# Altium PCB SDC_V3.0.PcbDoc (part 1 of 4)
Units mm, origin at the board's own origin, x right, y up, seen from the top; angles counter-clockwise.
Board outline 130 x 100 mm, 4 copper layers (Top Layer, Ground Plane, Power Plane, Bottom Layer), stack 1.466 mm thick; 369 components, 219 nets, 1234 pads, 1046 vias.
Unrouted connection lines stored in the file: 2.
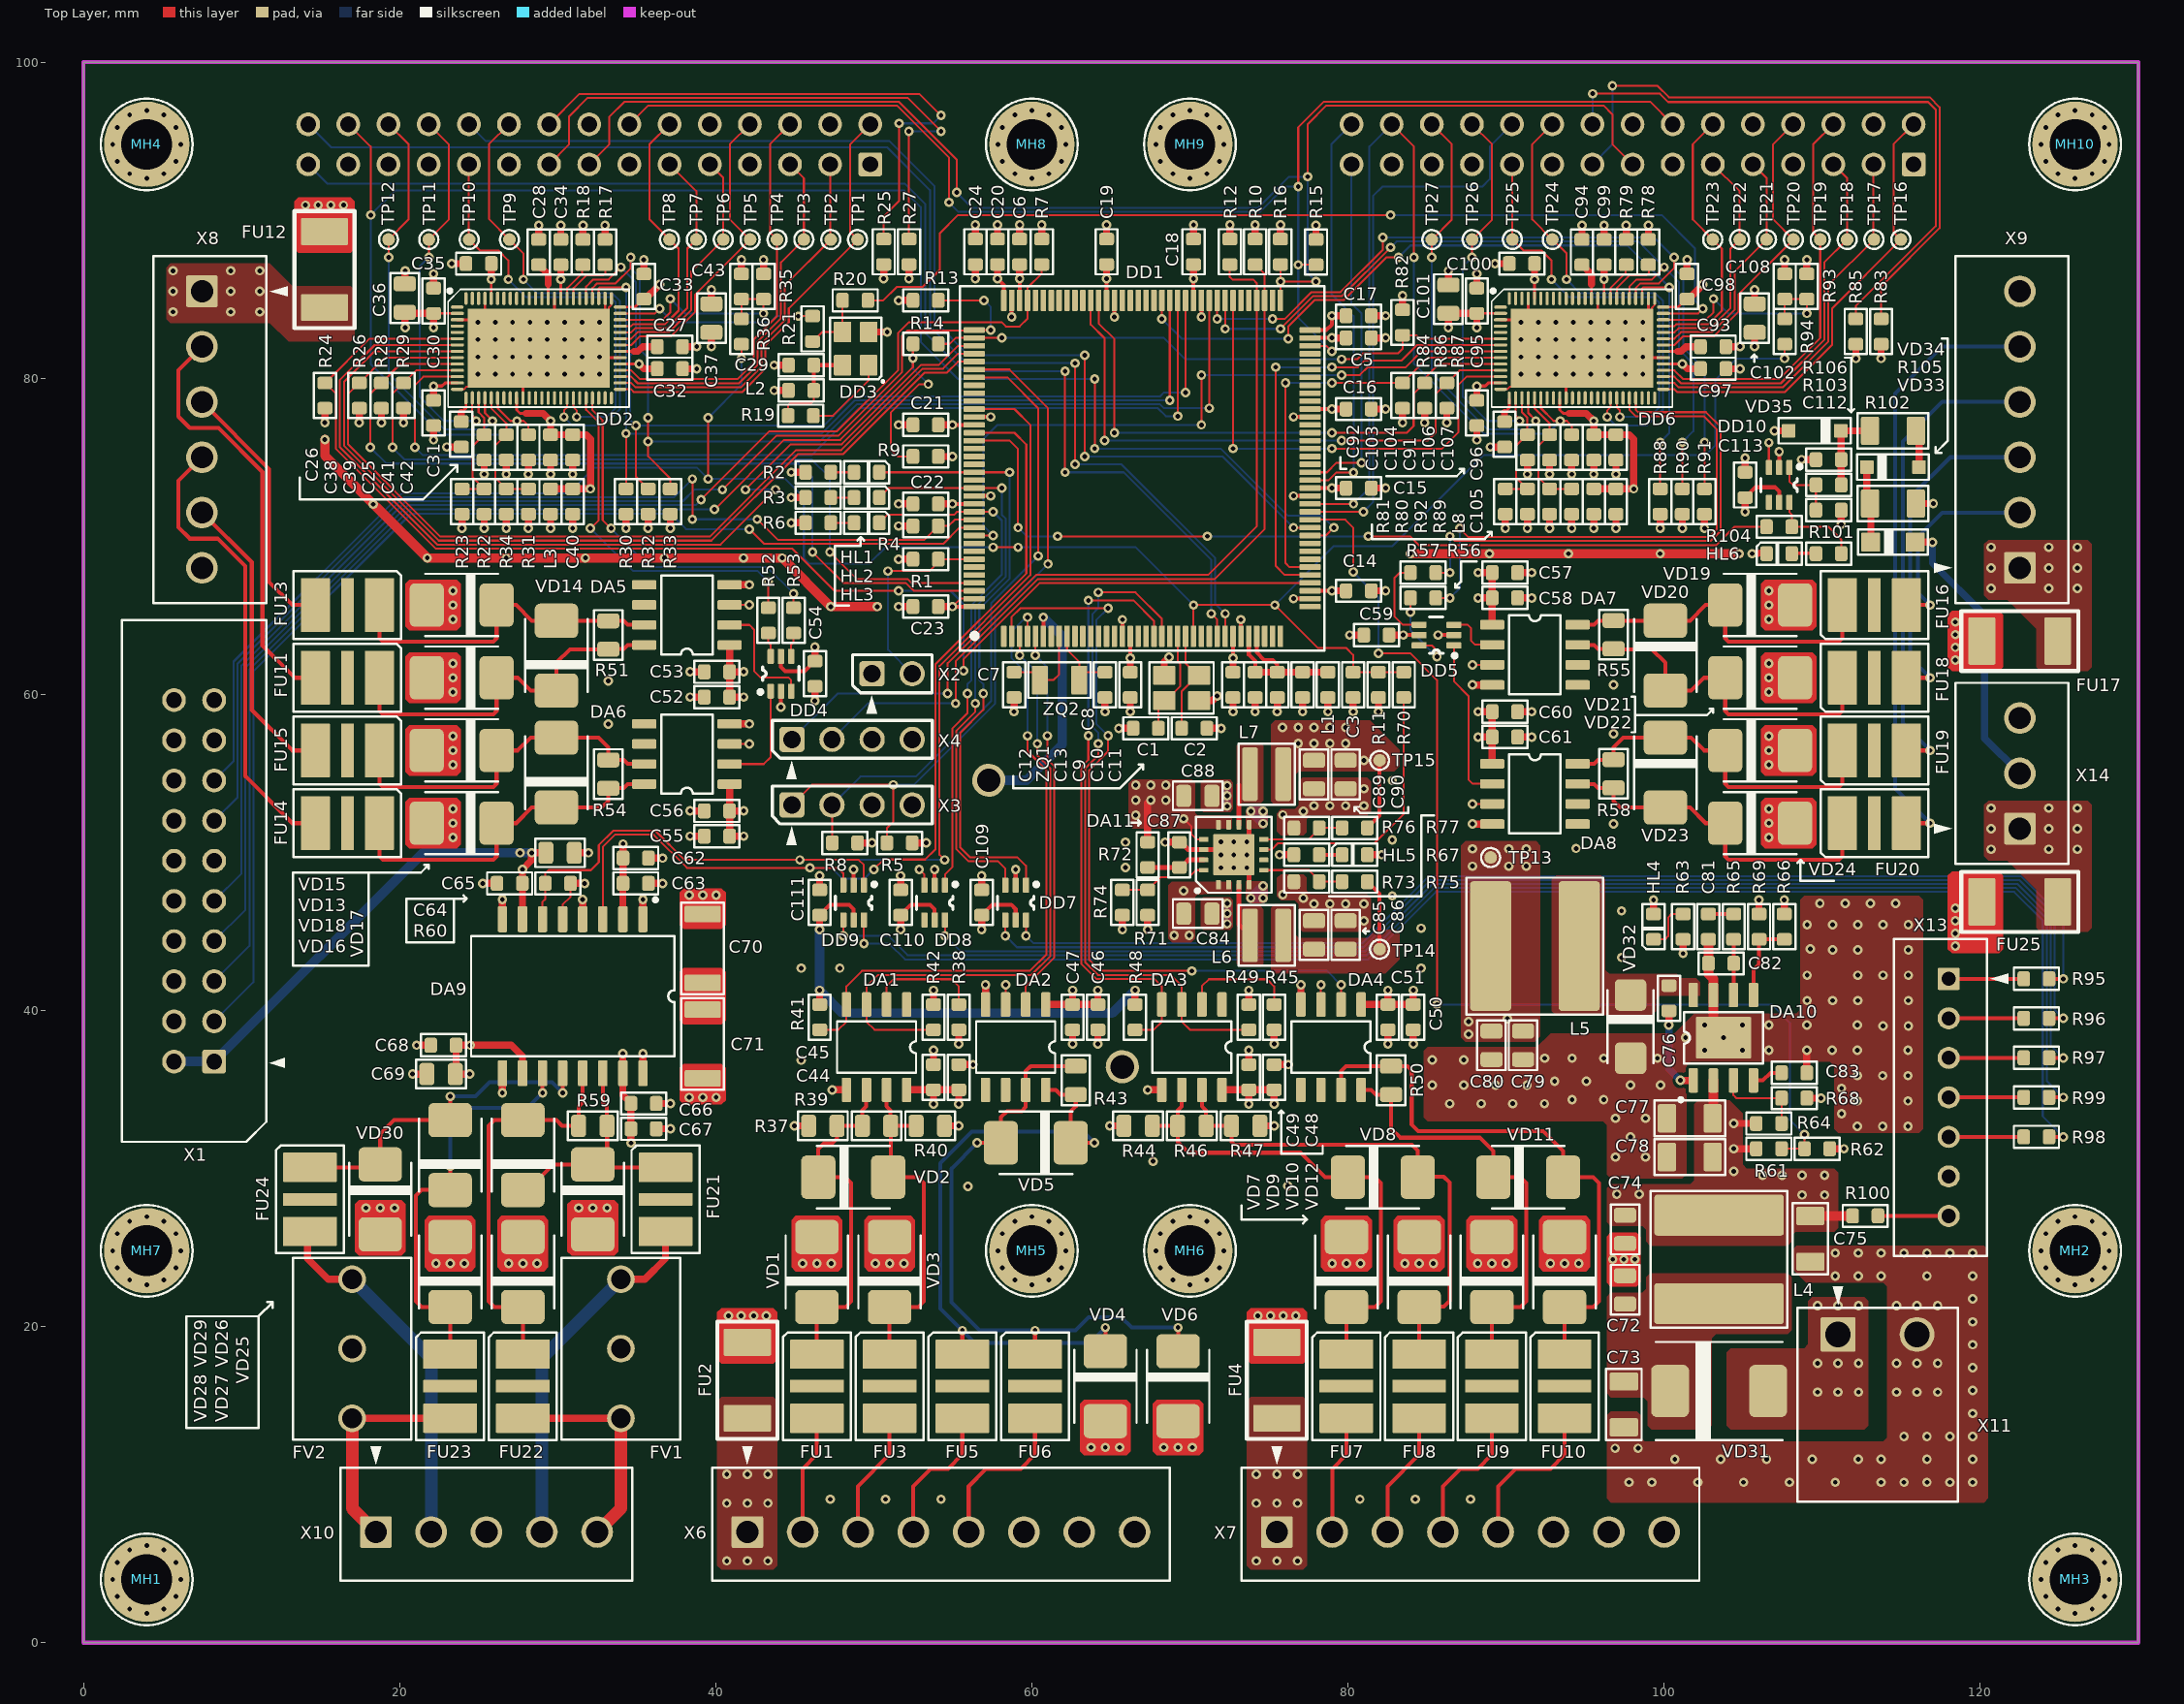
[diagram p0: Top Layer view]
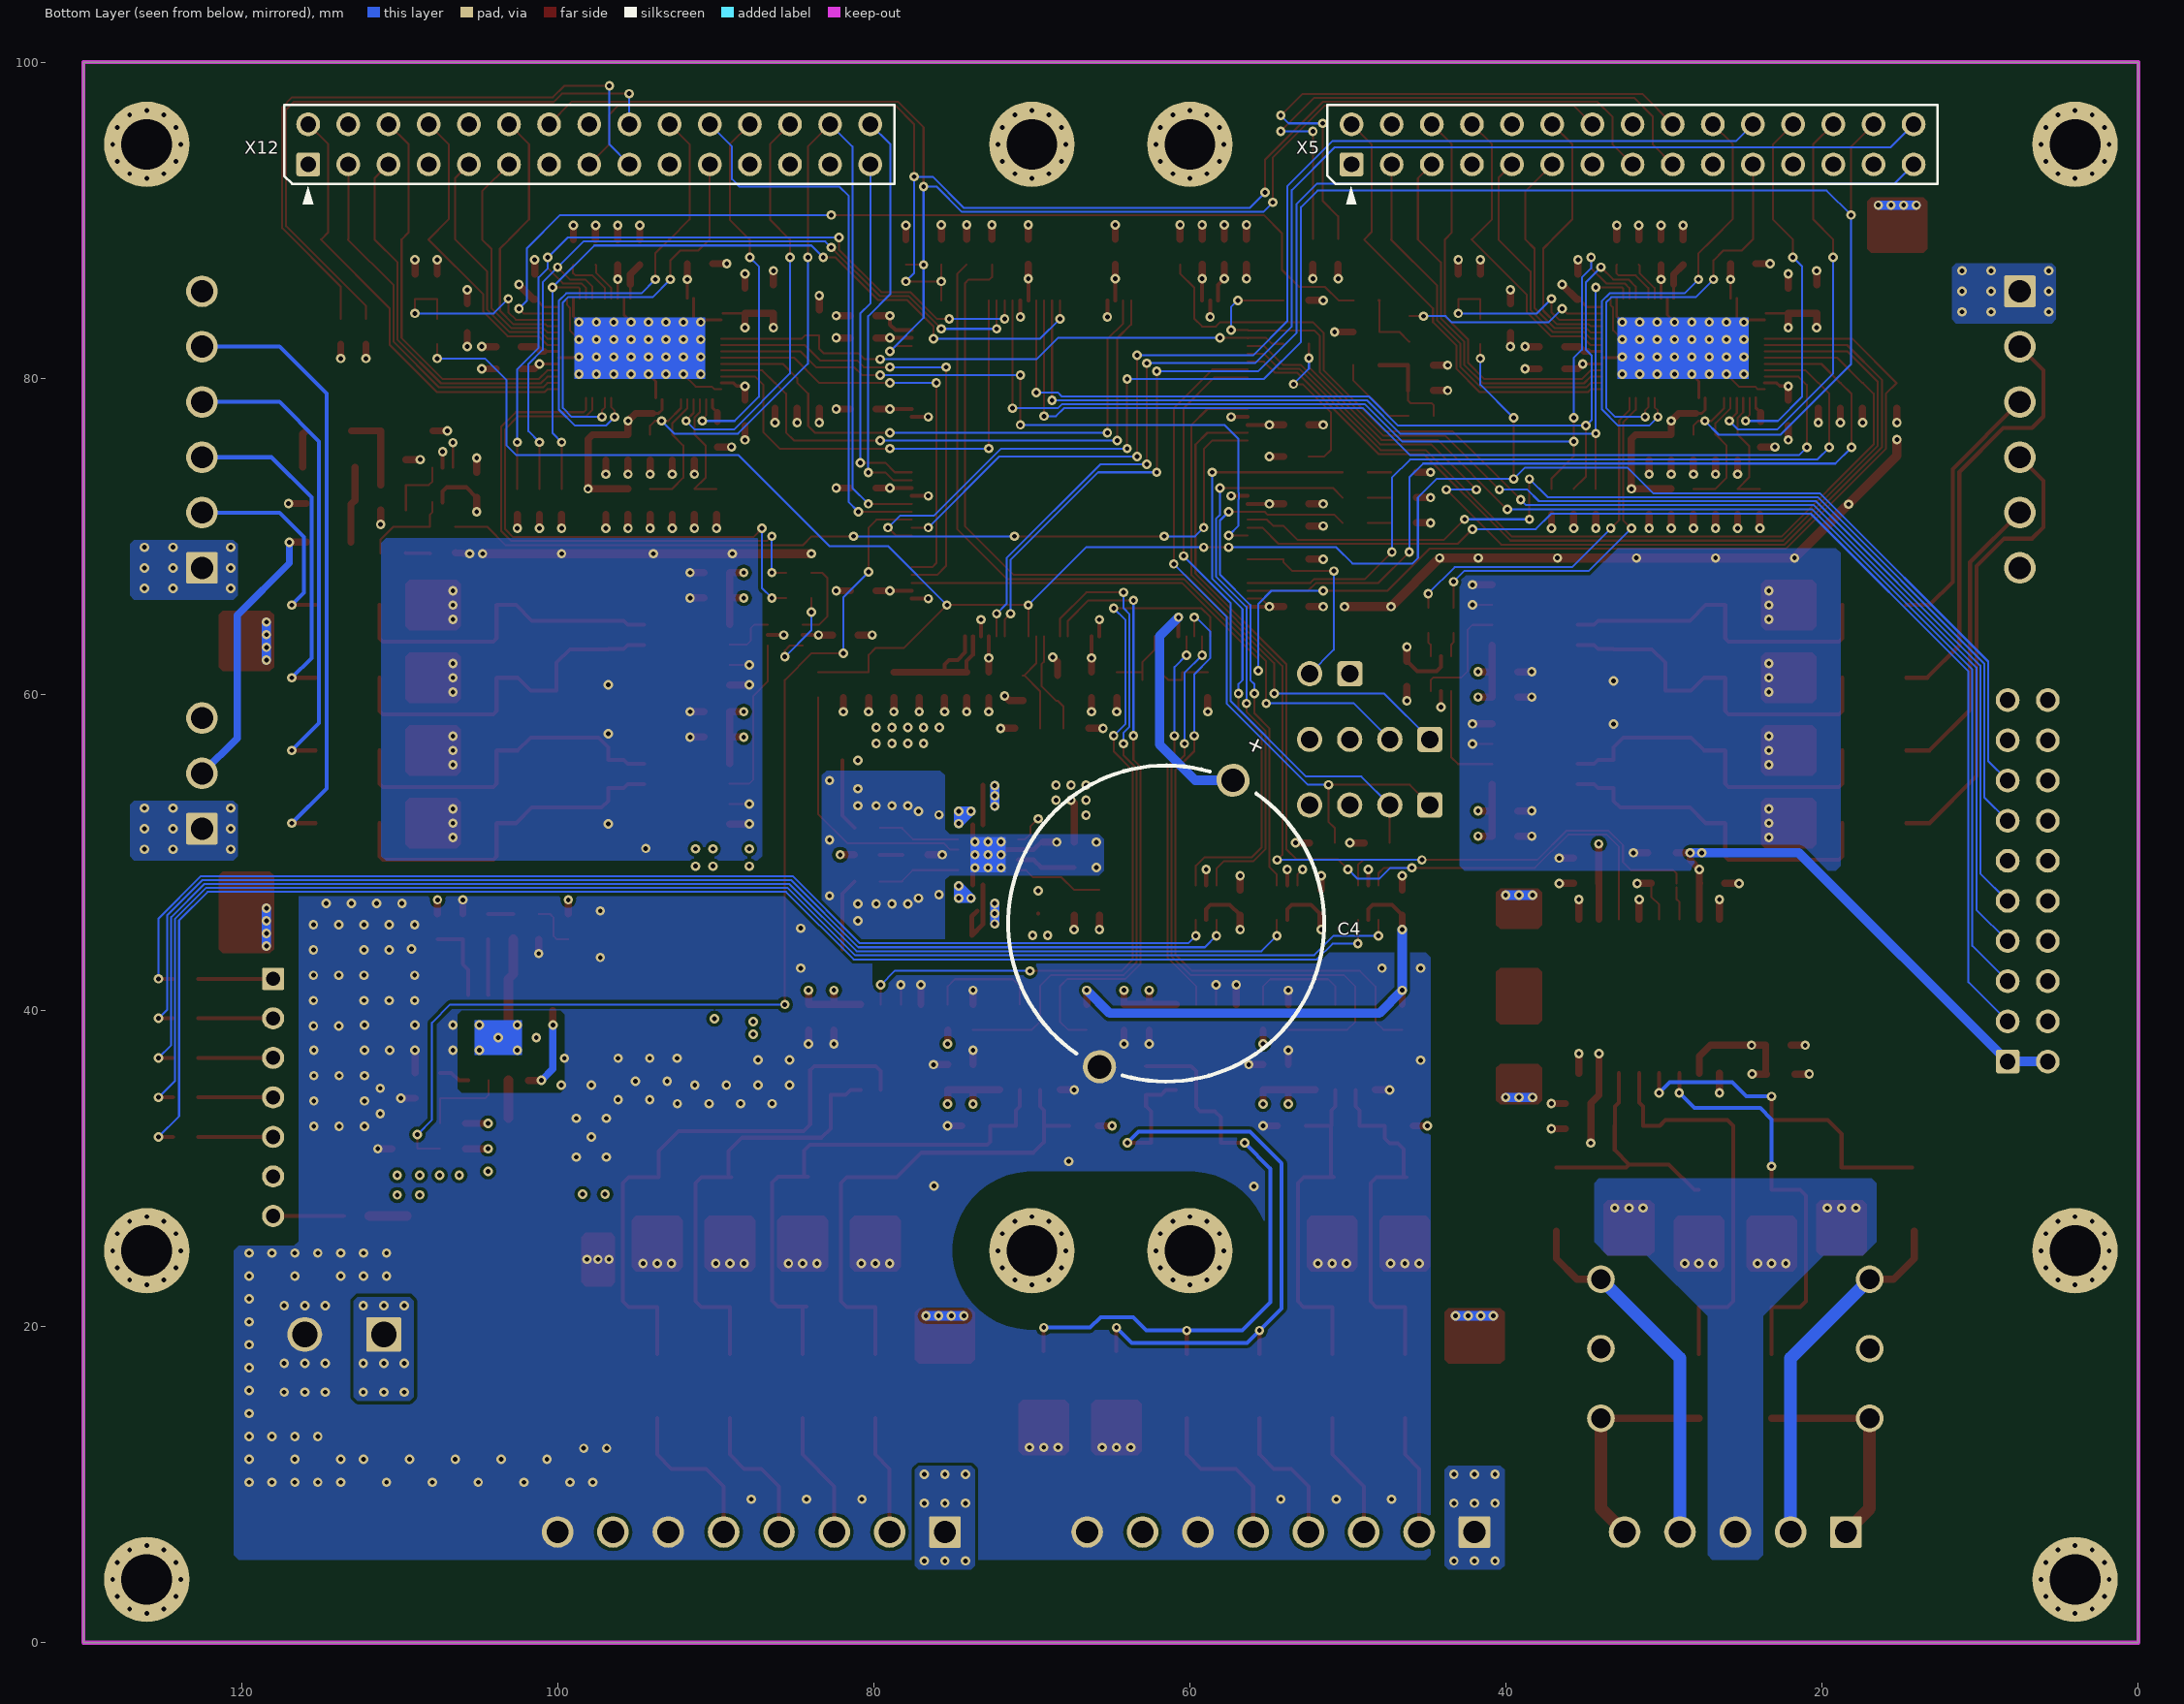
[diagram p1: Bottom Layer view, seen from below]
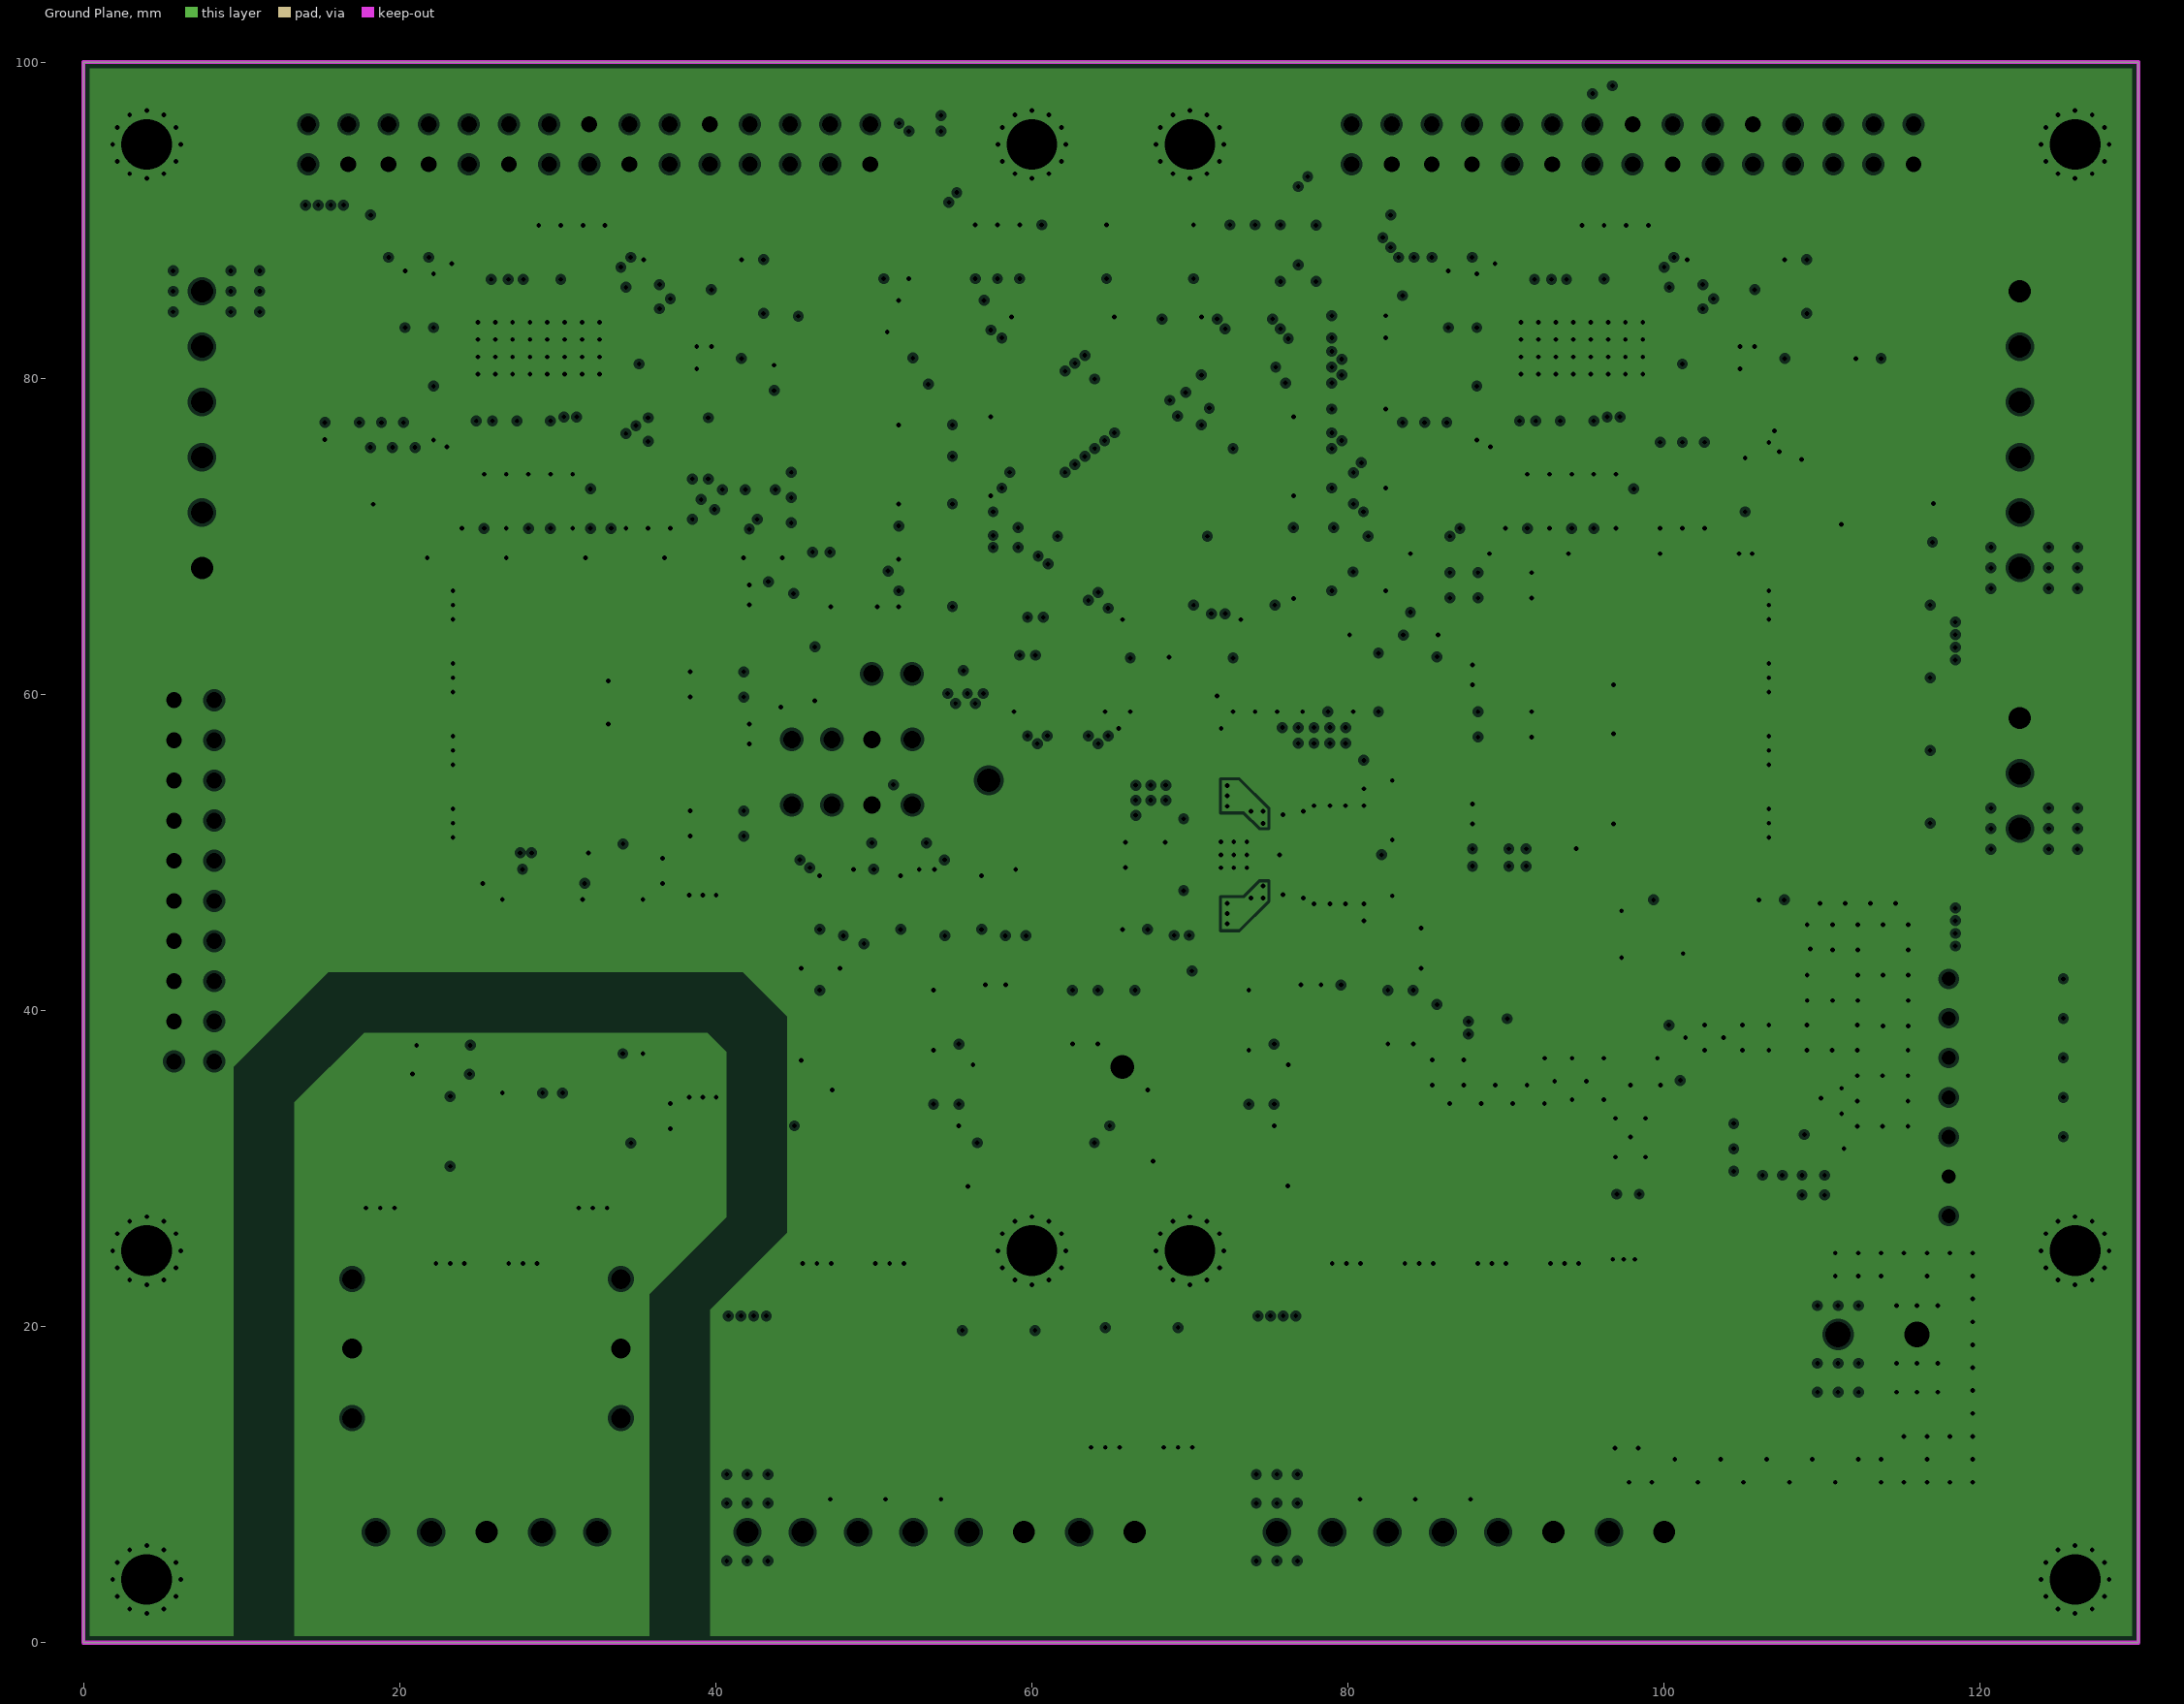
[diagram p2: Ground Plane, clearances drawn from the general rule]
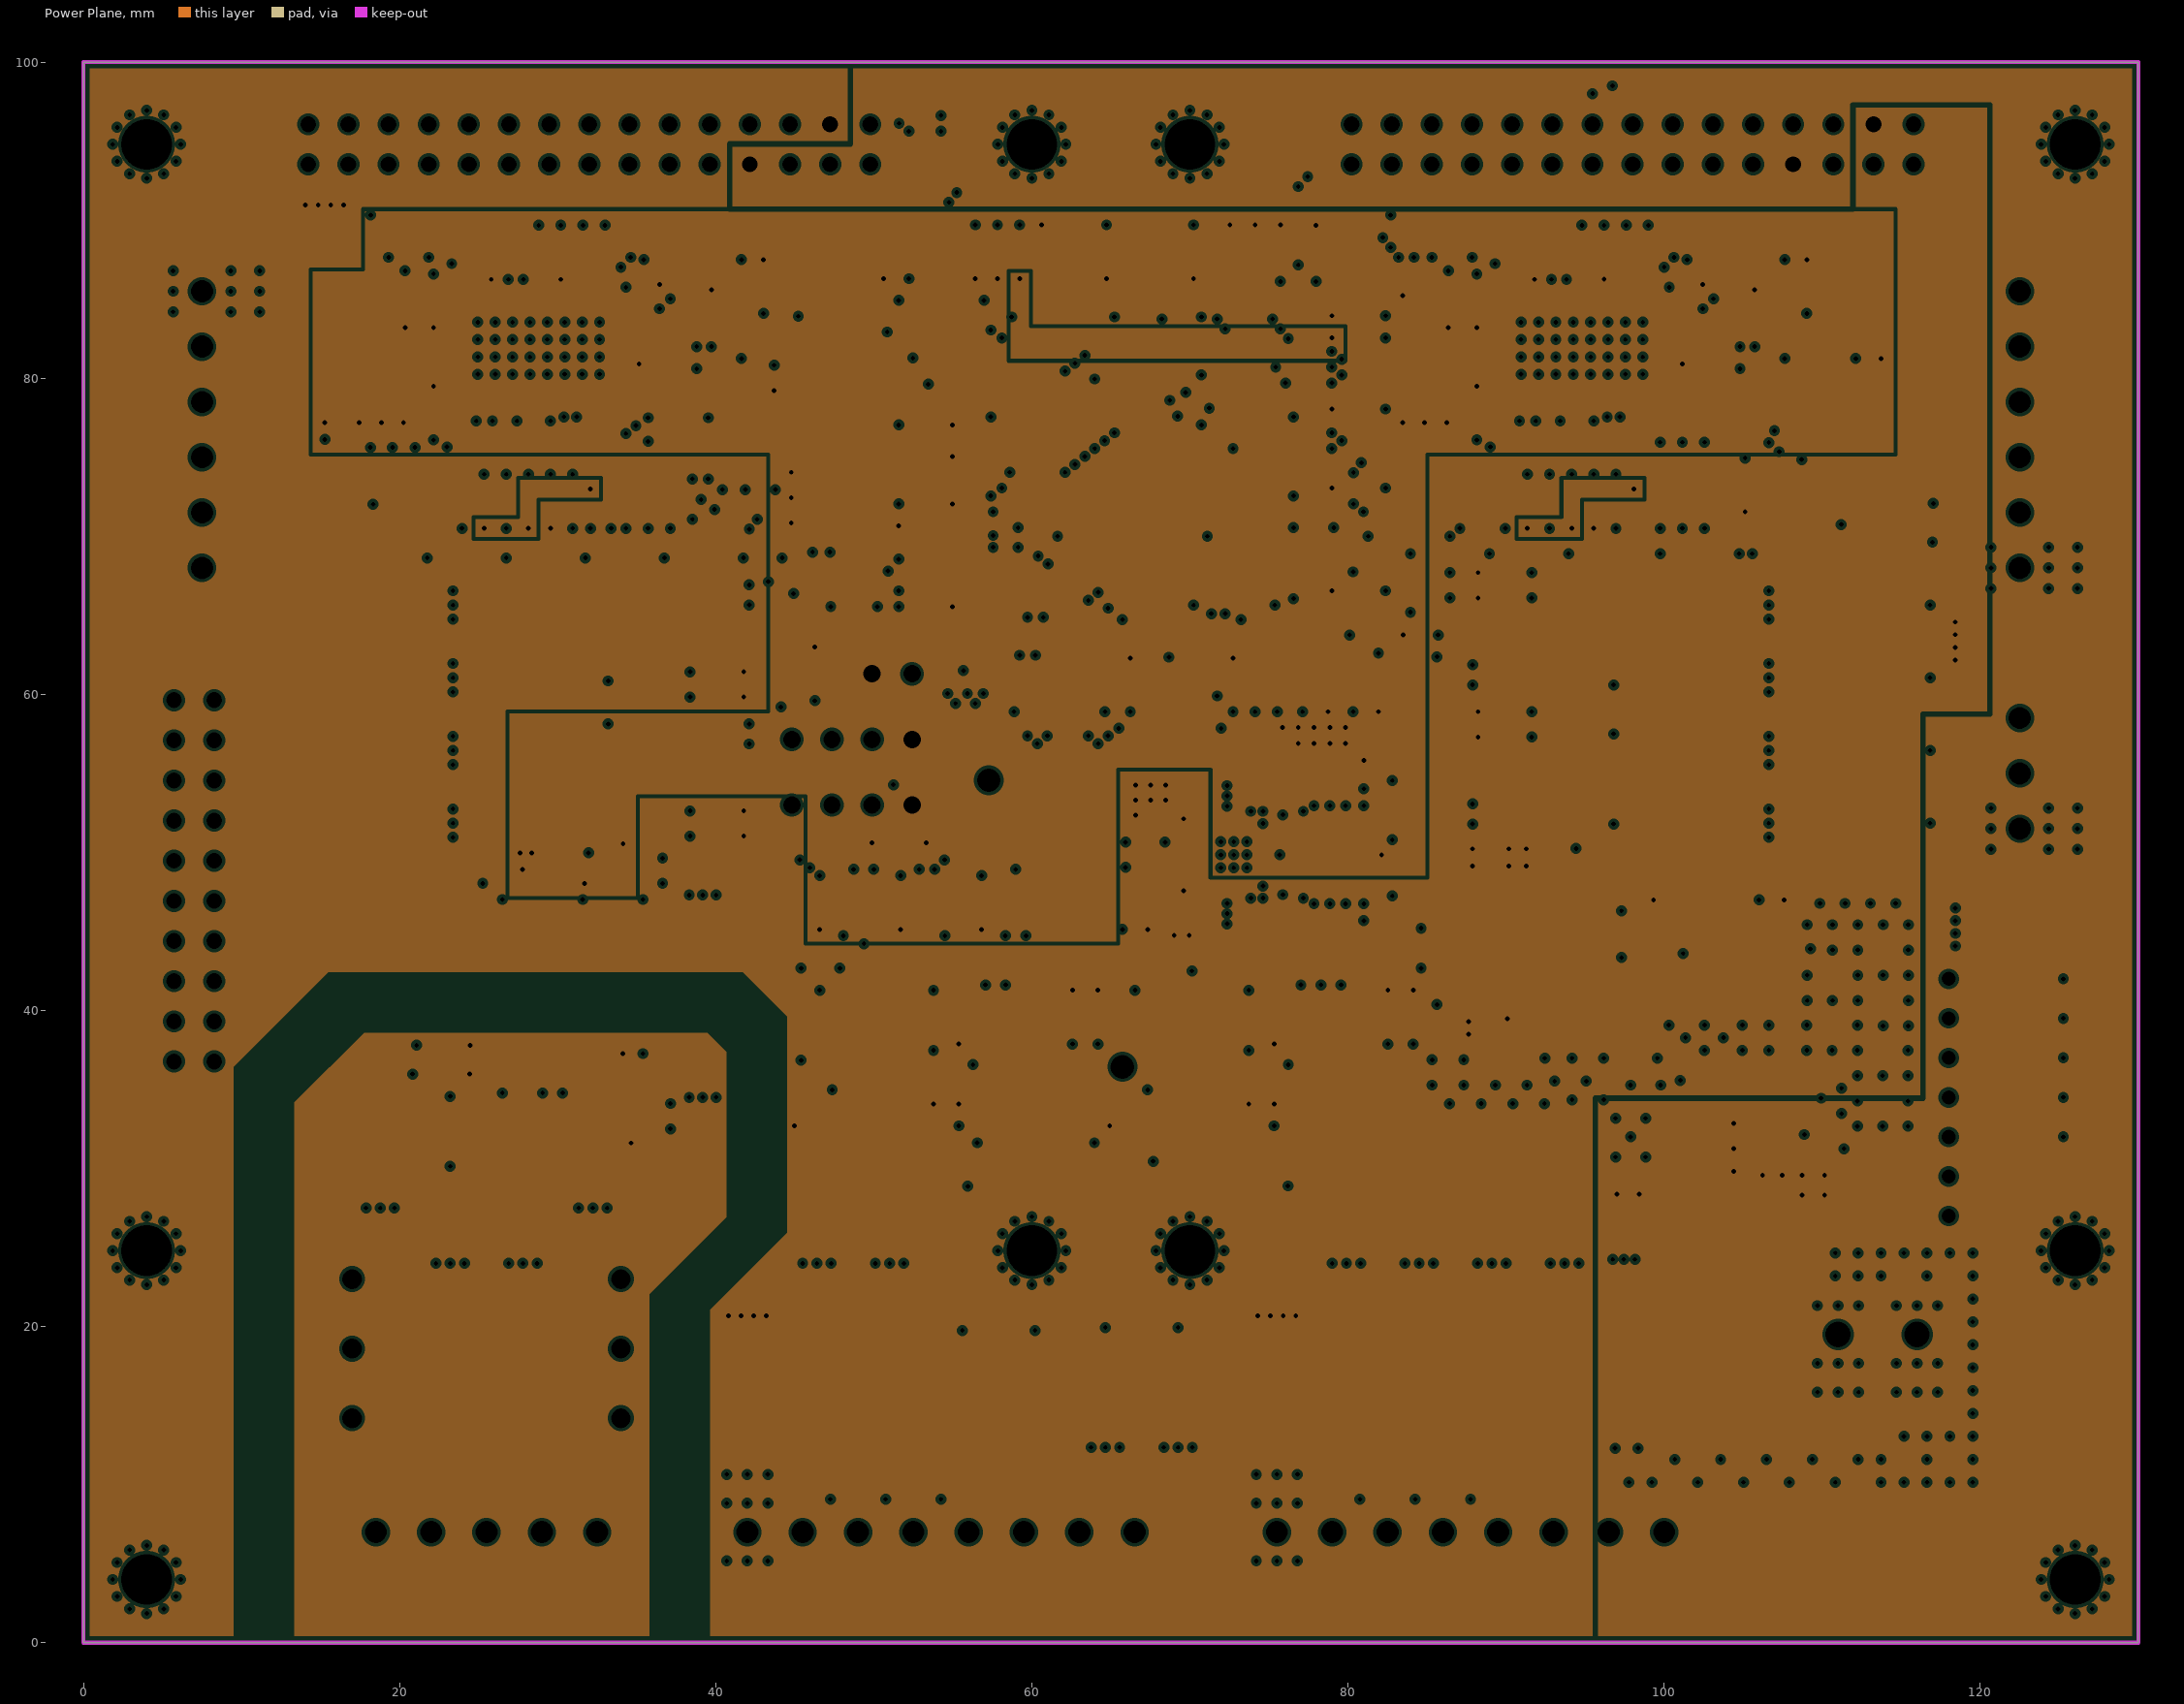
[diagram p3: Power Plane, clearances drawn from the general rule]

## Layer stack, top to bottom
Top Solder: solder mask 0.01, Solder Resist, Dk 3.5
Top Layer: signal copper 0.018
Dielectric 1: prepreg 0.115, Dk 4.2
Ground Plane: plane copper 0.018, net GND
Dielectric 3: core 1.164, Dk 4.2
Power Plane: plane copper 0.018, net (Multiple Nets)
Dielectric 2: prepreg 0.115, Dk 4.2
Bottom Layer: signal copper 0.018
Bottom Solder: solder mask 0.01, Solder Resist, Dk 3.5

## Board outline
0,0 0,100 130,100 130,0

## Design rules (kind name [scope] priority, off if disabled: settings)
Clearance ClearancePoly [InPolygon] p1: gap=0.2 ignorepadtopadclearanceinfootprint=FALSE except(0: Arc-Hole Track-Hole SMDPad-Hole THPad-Hole Via-Hole Fill-Hole Poly-Hole Region-Hole Text-Hole)
Clearance [All] p2: gap=0.125 ignorepadtopadclearanceinfootprint=FALSE except(0: Arc-Hole Track-Hole SMDPad-Hole THPad-Hole Via-Hole Fill-Hole Poly-Hole Region-Hole Text-Hole)
ComponentClearance [All] p1: gap=0 collisioncheckmode=3 verticalgap=0 showdistances=FALSE
DiffPairsRouting Ethernet_DP [(InDifferentialPairClass('ETH_RX') OR InDifferentialPairClass('ETH_TX'))] p1: maxlimit=0.13 minlimit=0.13 mostfreqgap=0.13 toplayer_minwidth=0.125 toplayer_maxwidth=0.125 toplayer_prefwidth=0.125 bottomlayer_minwidth=0.125 bottomlayer_maxwidth=0.125 bottomlayer_prefwidth=0.125 maxuncoupledlength=15
DiffPairsRouting [All] p2: maxlimit=0.254 minlimit=0.254 mostfreqgap=0.254 toplayer_minwidth=0.381 toplayer_maxwidth=0.381 toplayer_prefwidth=0.381 bottomlayer_minwidth=0.381 bottomlayer_maxwidth=0.381 bottomlayer_prefwidth=0.381 maxuncoupledlength=12.7
Height [All] p1: minheight=0 maxheight=100 prefheight=100
HoleSize [All] p1: absolutevalues=TRUE maxlimit=5 minlimit=0.3 maxpercent=80.000 minpercent=20.000
HoleToHoleClearance [All] p1: gap=0.2 allowstackedmicrovias=TRUE
MinimumAnnularRing MinimumAnnularRing_0.3 [Not IsVia] p1: minimumring=0.2
MinimumSolderMaskSliver [All] p1: minsoldermaskwidth=0.15
PlaneClearance [All] p1: clearance=0.2
PlaneConnect [All] p1: planeconnectstyle=Direct reliefexpansion=0.508 reliefentries=4 reliefconductorwidth=0.254 reliefairgap=0.254
PolygonConnect PolygonConnectVIA [IsVia] p1: connectstyle=Direct reliefconductorwidth=0.254 reliefentries=4 polygonreliefangle="90 Angle" airgapwidth=0.254
PolygonConnect [All] p2: connectstyle=Direct reliefconductorwidth=0.3 reliefentries=4 polygonreliefangle="90 Angle" airgapwidth=0.3
RoutingVias [IsVia] p1: holewidth=0.3 width=0.6 viastyle="Through Hole" minholewidth=0.3 minwidth=0.6 maxholewidth=2 maxwidth=1.5
SilkToSilkClearance [All] p1: silktosilkclearance=0
SilkToSolderMaskClearance [IsPad] p1: minsilkscreentomaskgap=0 clearancetoexposedcopper=TRUE
SolderMaskExpansion [All] p1: expansion=0.05 istentingtop=FALSE
Width Width_Arcs [IsArc] p1: maxlimit=0.254 minlimit=0.1 preferedwidth=0.254
Width [All] p2: maxlimit=10 minlimit=0.125 preferedwidth=0.125
20 further rules are at their usual default settings.

## Classes and differential pairs
component class SNS_INPUT: C112 C113 DD10 FU25 HL6 R101 R102 R103 R104 R105 R106 VD33 VD34 VD35 X14
component class EXT_LED: C109 C110 C111 DD7 DD8 DD9 R95 R96 R97 R98 R99 R100 X13
component class INC_ENC_IF: C52 C53 C54 C55 C56 C57 C58 C59 C60 C61 DA5 DA6 DA7 DA8 DD4 DD5 FU11 FU12 FU13 FU14 FU15 FU16 FU17 FU18 FU19 FU20 R51 R52 R53 R54 R55 R56 R57 R58 VD13 VD14 VD15 VD16 VD17 VD18 VD19 VD20 VD21 VD22 VD23 VD24 X8 X9
component class RS_IF: C62 C63 C64 C65 C66 C67 C68 C69 C70 C71 DA9 FU21 FU22 FU23 FU24 FV1 FV2 R59 R60 VD25 VD26 VD27 VD28 VD29 VD30 X10
component class ABS_ENC_IF: C44 C45 C46 C47 C48 C49 C50 C51 DA1 DA2 DA3 DA4 FU1 FU2 FU3 FU4 FU5 FU6 FU7 FU8 FU9 FU10 R37 R38 R39 R40 R41 R42 R43 R44 R45 R46 R47 R48 R49 R50 VD1 VD2 VD3 VD4 VD5 VD6 VD7 VD8 VD9 VD10 VD11 VD12 X6 X7
component class DRIVER_A: C25 C26 C27 C28 C29 C30 C31 C32 C33 C34 C35 C36 C37 C38 C39 C40 C41 C42 C43 DD2 DD3 L2 L3 R17 R18 R19 R20 R21 R22 R23 R24 R25 R26 R27 R28 R29 R30 R31 R32 R33 R34 R35 R36 TP1 TP2 TP3 TP4 TP5 TP6 TP7 TP8 TP9 TP10 TP11 TP12 X5
component class MCU: C1 C2 C3 C4 C5 C6 C7 C8 C9 C10 C11 C12 C13 C14 C15 C16 C17 C18 C19 C20 C21 C22 C23 C24 DD1 HL1 HL2 HL3 L1 R1 R2 R3 R4 R5 R6 R7 R8 R9 R10 R11 R12 R13 R14 R15 R16 X1 X2 X3 X4 ZQ1 ZQ2
component class DRIVER_B: C91 C92 C93 C94 C95 C96 C97 C98 C99 C100 C101 C102 C103 C104 C105 C106 C107 C108 DD6 L8 R78 R79 R80 R81 R82 R83 R84 R85 R86 R87 R88 R89 R90 R91 R92 R93 R94 TP16 TP17 TP18 TP19 TP20 TP21 TP22 TP23 TP24 TP25 TP26 TP27 X12
component class POWER: C72 C73 C74 C75 C76 C77 C78 C79 C80 C81 C82 C83 C84 C85 C86 C87 C88 C89 C90 DA10 DA11 HL4 HL5 L4 L5 L6 L7 MH1 MH2 MH3 MH4 MH5 MH6 MH7 MH8 MH9 MH10 R61 R62 R63 R64 R65 R66 R67 R68 R69 R70 R71 R72 R73 R74 R75 R76 R77 TP13 TP14 TP15 VD31 VD32 X11

## Components (designator, comment, footprint, x,y, rotation, side; value= is the part's Value field where it differs from the comment)
C1 "6.8pF" C0603N 67.2,57.85 r180 top
C2 "6.8pF" C0603N 70.275,57.85 r0 top
C3 "0.1uF" C0603N 80.325,60.6 r90 top
C4 "1.5F" KR-5R5H155-R 61.5,45.5 r115 bottom
C5 "2.2uF" C0603N 80.675,82.55 r180 top
C6 "2.2uF" C0603N 59.225,88 r270 top
C7 "4.7pF" C0603N 58.875,60.6 r270 top
C8 "4.7pF" C0603N 64.625,60.6 r270 top
C9 "0.1uF" C0603N 74.125,60.6 r90 top
C10 "0.1uF" C0603N 75.525,60.6 r90 top
C11 "4.7uF" C0603N 77.125,60.6 r90 top
C12 "0.1uF" C0603N 66.225,60.6 r90 top
C13 "0.1uF" C0603N 72.725,60.6 r90 top
C14 "0.1uF" C0603N 80.675,66.55 r180 top
C15 "0.1uF" C0603N 80.675,73.05 r180 top
C16 "0.1uF" C0603N 80.675,78.05 r180 top
C17 "0.1uF" C0603N 80.675,83.95 r180 top
C18 "0.1uF" C0603N 70.225,88 r270 top
C19 "0.1uF" C0603N 64.725,88 r270 top
C20 "0.1uF" C0603N 57.825,88 r270 top
C21 "0.1uF" C0603N 53.275,77.05 r0 top
C22 "0.1uF" C0603N 53.275,72.05 r0 top
C23 "0.1uF" C0603N 53.275,65.55 r0 top
C24 "4.7uF" C0603N 56.425,88 r270 top
C25 "0.1uF" C0603N 28.15,75.625 r90 top
C26 "0.1uF" C0603N 23.9,76.45 r90 top
C27 "0.1uF" C0603N 37.1,82 r180 top
C28 "0.1uF" C0603N 28.8,87.975 r270 top
C29 "10nF" C0603N 45.4,80.825 r180 top
C30 "0.1uF" C0603N 22.15,84.9 r270 top
C31 "0.1uF" C0603N 22.15,77.8 r90 top
C32 "0.1uF" C0603N 37.1,80.6 r180 top
C33 "0.1uF" C0603N 35.45,85.8 r270 top
C34 "0.1uF" C0603N 30.2,87.975 r270 top
C35 "0.1uF" C0603N 25,87.25 r0 top
C36 "22uF" C0805N 20.325,85.075 r270 top
C37 "22uF" C0805N 39.725,83.8 r90 top
C38 "0.1uF" C0603N 25.35,75.625 r90 top
C39 "0.1uF" C0603N 26.75,75.625 r90 top
C40 "1uF" C0603N 30.95,72.2 r90 top
C41 "0.1uF" C0603N 29.55,75.625 r90 top
C42 "4.7uF" C0603N 30.95,75.625 r90 top
C43 "0.1uF" C0603N 41.625,85.8 r270 top
C44 "4.7uF" C0603N 55.375,35.775 r270 top
C45 "0.1uF" C0603N 53.775,35.775 r270 top
C46 "4.7uF" C0603N 64.175,39.575 r90 top
C47 "0.1uF" C0603N 62.575,39.575 r90 top
C48 "4.7uF" C0603N 75.325,35.775 r270 top
C49 "0.1uF" C0603N 73.725,35.775 r270 top
C50 "4.7uF" C0603N 84.125,39.575 r90 top
C51 "0.1uF" C0603N 82.525,39.575 r90 top
C52 "4.7uF" C0603N 40.075,59.825 r0 top
C53 "0.1uF" C0603N 40.075,61.425 r0 top
C54 "0.1uF" C0603N 46.275,61.3 r90 top
C55 "4.7uF" C0603N 40.075,51.025 r0 top
C56 "0.1uF" C0603N 40.075,52.625 r0 top
C57 "4.7uF" C0603N 89.925,67.7 r180 top
C58 "0.1uF" C0603N 89.925,66.1 r180 top
C59 "0.1uF" C0603N 81.8,63.75 r0 top
C60 "4.7uF" C0603N 89.925,58.9 r180 top
C61 "0.1uF" C0603N 89.925,57.3 r180 top
C62 "0.1uF" C0603N 34.937,49.637 r180 top
C63 "10nF" C0603N 34.937,48.037 r0 top
C64 "10uF" C0805N 30.15,49.975 r180 top
C65 "0.1uF" C0603N 26.962,48.037 r0 top
C66 "10nF" C0603N 35.437,34.112 r0 top
C67 "0.1uF" C0603N 35.437,32.512 r180 top
C68 "0.1uF" C0603N 22.775,37.8 r0 top
C69 "10uF" C0805N 22.625,35.975 r0 top
C70 "1nF" C1808N 39.175,43.925 r90 top
C71 "1nF" C1808N 39.175,37.875 r90 top
C72 "0.1uF" C0805N 97.525,22.325 r270 top
C73 "10uF" C1206N 97.45,15.075 r90 top
C74 "0.1uF" C0805N 97.525,26.15 r90 top
C75 "10uF" C1206N 109.25,25.55 r90 top
C76 "0.1uF" C0603N 100.3,40.775 r270 top
C77 "10uF" C1206N 101.625,33.175 r0 top
C78 "10uF" C1206N 101.625,30.725 r0 top
C79 "22uF" C0805N 91.075,37.8 r90 top
C80 "22uF" C0805N 89.075,37.8 r90 top
C81 "1nF" C0603N 102.8,45.3 r90 top
C82 "6.8pF" C0603N 103.6,42.975 r0 top
C83 "8.2nF" C0603N 108.225,36.05 r180 top
C84 "10uF" C0805N 70.5,46.125 r180 top
C85 "22uF" C0805N 77.85,44.775 r270 top
C86 "22uF" C0805N 79.85,44.775 r270 top
C87 "0.47uF" C0603N 69.325,49.85 r270 top
C88 "10uF" C0805N 70.5,53.575 r180 top
C89 "22uF" C0805N 77.85,54.925 r90 top
C90 "22uF" C0805N 79.85,54.925 r90 top
C91 "0.1uF" C0603N 94.15,75.625 r90 top
C92 "0.1uF" C0603N 89.9,76.45 r90 top
C93 "0.1uF" C0603N 103.1,82 r180 top
C94 "0.1uF" C0603N 94.8,87.975 r270 top
C95 "0.1uF" C0603N 88.15,84.9 r270 top
C96 "0.1uF" C0603N 88.15,77.8 r90 top
C97 "0.1uF" C0603N 103.1,80.6 r180 top
C98 "0.1uF" C0603N 101.45,85.8 r270 top
C99 "0.1uF" C0603N 96.2,87.975 r270 top
C100 "0.1uF" C0603N 91,87.25 r0 top
C101 "22uF" C0805N 86.35,85 r270 top
C102 "22uF" C0805N 105.725,83.8 r90 top
C103 "0.1uF" C0603N 91.35,75.625 r90 top
C104 "0.1uF" C0603N 92.75,75.625 r90 top
C105 "1uF" C0603N 96.95,72.2 r90 top
C106 "0.1uF" C0603N 95.55,75.625 r90 top
C107 "4.7uF" C0603N 96.95,75.625 r90 top
C108 "0.1uF" C0603N 107.625,85.8 r270 top
C109 "0.1uF" C0603N 56.825,46.825 r270 top
C110 "0.1uF" C0603N 51.7,46.825 r270 top
C111 "0.1uF" C0603N 46.575,46.825 r270 top
C112 "10nF" C0603N 110.4,71.65 r0 top
C113 "0.1uF" C0603N 105.125,73.25 r270 top
DA1 "ADM4852ARZ" SOIC8 50.175,37.675 r270 top
DA2 "ADM4857ARZ" SOIC8 58.975,37.675 r270 top
DA3 "ADM4852ARZ" SOIC8 70.125,37.675 r270 top
DA4 "ADM4857ARZ" SOIC8 78.925,37.675 r270 top
DA5 "ADM4857ARZ" SOIC8 38.175,65.025 r180 top
DA6 "ADM4857ARZ" SOIC8 38.175,56.225 r180 top
DA7 "ADM4857ARZ" SOIC8 91.825,62.5 r0 top
DA8 "ADM4857ARZ" SOIC8 91.825,53.7 r0 top
DA9 "ADM2687EBRIZ" SOIC16_IC 30.95,40.9 r180 top
DA10 "TPS54332DDAR" SOIC8-EP 103.75,38.275 r90 top
DA11 "LM26420XSQ/NOPB" RUM0016A 72.775,49.85 r90 top
DD1 "STM32H743ZIT6" LQFP144 66.975,74.3 r0 top
DD2 "TMC4671-LA" QFN76-EP 28.8,81.9 r0 top
DD3 "ASE-25.000MHZ-L-C-T" ASE 48.85,81.875 r90 top
DD4 "74LVC2G17GW,125" SOT363-2 44.125,61.3 r0 top
DD5 "74LVC2G17GW,125" SOT363-2 85.6,63.75 r90 top
DD6 "TMC4671-LA" QFN76-EP 94.8,81.9 r0 top
DD7 "74LVC2G17GW,125" SOT363-2 58.975,46.825 r180 top
DD8 "74LVC2G17GW,125" SOT363-2 53.85,46.825 r180 top
DD9 "74LVC2G17GW,125" SOT363-2 48.725,46.825 r180 top
DD10 "74LVC2G17GW,125" SOT363-2 107.275,73.25 r180 top
FU1 "200mA" TBU-CA 46.4,16.225 r270 top
FU2 "300mA" MF-MSMF 42,16.6 r270 top
FU3 "200mA" TBU-CA 51,16.225 r270 top
FU4 "300mA" MF-MSMF 75.5,16.6 r270 top
FU5 "200mA" TBU-CA 55.6,16.225 r270 top
FU6 "200mA" TBU-CA 60.2,16.225 r270 top
FU7 "200mA" TBU-CA 79.9,16.225 r270 top
FU8 "200mA" TBU-CA 84.5,16.225 r270 top
FU9 "200mA" TBU-CA 89.1,16.225 r270 top
FU10 "200mA" TBU-CA 93.7,16.225 r270 top
FU11 "200mA" TBU-CA 16.7,61.05 r180 top
FU12 "300mA" MF-MSMF 15.25,86.875 r270 top
FU13 "200mA" TBU-CA 16.7,65.65 r180 top
FU14 "200mA" TBU-CA 16.7,51.85 r180 top
FU15 "200mA" TBU-CA 16.7,56.45 r180 top
FU16 "200mA" TBU-CA 113.3,65.65 r0 top
FU17 "300mA" MF-MSMF 122.5,63.375 r0 top
FU18 "200mA" TBU-CA 113.3,61.05 r0 top
FU19 "200mA" TBU-CA 113.3,56.45 r0 top
FU20 "200mA" TBU-CA 113.3,51.85 r0 top
FU21 "200mA" TBU-CA 36.825,28.05 r270 top
FU22 "200mA" TBU-CA 27.8,16.225 r270 top
FU23 "200mA" TBU-CA 23.2,16.225 r270 top
FU24 "200mA" TBU-CA 14.325,28.05 r270 top
FU25 "500mA" MF-MSMF 122.5,46.875 r180 top
FV1 "F3R75-01J 75V" GDT_3PIN_B2 34,18.6 r270 top
FV2 "F3R75-01J 75V" GDT_3PIN_B2 17,18.6 r90 top
HL1 "GNL-0603SRC" LED0603 49.55,74.05 r180 top
HL2 "GNL-0603GC" LED0603 49.55,72.45 r180 top
HL3 "GNL-0603GC" LED0603 49.55,70.85 r180 top
HL4 "GNL-0603GC" LED0603 99.325,45.3 r90 top
HL5 "GNL-0603GC" LED0603 80.425,49.85 r0 top
HL6 "GNL-0603GC" LED0603 107.275,68.9 r0 top
L1 "600 @ 100MHz" FB0603N 78.725,60.6 r90 top
L2 "600 @ 100MHz" FB0603N 45.4,79.225 r180 top
L3 "600 @ 100MHz" FB0603N 29.55,72.2 r90 top
L4 "10uH" SRN8040 103.475,24.25 r90 top
L5 "10uH" SRN8040 91.825,44.075 r180 top
L6 "2.2uH" VLS3012HBX 74.85,44.75 r0 top
L7 "2.2uH" VLS3012HBX 74.85,54.95 r0 top
L8 "600 @ 100MHz" FB0603N 95.55,72.2 r90 top
MH1 "MNT_HOLE_PL" MH_3.2_5.4_PLATED_VIA 4,4 r180 top
MH2 "MNT_HOLE_PL" MH_3.2_5.4_PLATED_VIA 126,24.8 r180 top
MH3 "MNT_HOLE_PL" MH_3.2_5.4_PLATED_VIA 126,4 r180 top
MH4 "MNT_HOLE_PL" MH_3.2_5.4_PLATED_VIA 4,94.8 r180 top
MH5 "MNT_HOLE_PL" MH_3.2_5.4_PLATED_VIA 60,24.8 r180 top
MH6 "MNT_HOLE_PL" MH_3.2_5.4_PLATED_VIA 70,24.8 r180 top
MH7 "MNT_HOLE_PL" MH_3.2_5.4_PLATED_VIA 4,24.8 r180 top
MH8 "MNT_HOLE_PL" MH_3.2_5.4_PLATED_VIA 60,94.8 r180 top
MH9 "MNT_HOLE_PL" MH_3.2_5.4_PLATED_VIA 70,94.8 r180 top
MH10 "MNT_HOLE_PL" MH_3.2_5.4_PLATED_VIA 126,94.8 r180 top
R1 "1k" R0603N 53.275,68.55 r180 top
R2 "1.5k" R0603N 46.475,74.05 r0 top
R3 "1.5k" R0603N 46.475,72.45 r0 top
R4 "10k" R0603N 53.275,70.65 r0 top
R5 "10k" R0603N 51.625,50.6 r180 top
R6 "1.5k" R0603N 46.475,70.85 r0 top
R7 "10k" R0603N 60.625,88 r270 top
R8 "10k" R0603N 48.175,50.6 r180 top
R9 "DNI" R0603N 53.275,75.05 r180 top
R10 "10k" R0603N 74.125,88 r270 top
R11 "10k" R0603N 81.925,60.6 r90 top
R12 "10k" R0603N 72.525,88 r270 top
R13 "10k" R0603N 53.275,84.925 r180 top
R14 "0" R0603N 53.275,82.175 r0 top
R15 "5.1k" R0603N 77.975,87.975 r270 top
R16 "5.1k" R0603N 75.725,88 r270 top
R17 "10k" R0603N 33,87.975 r90 top
R18 "10k" R0603N 31.6,87.975 r90 top
R19 "1k" R0603N 45.375,77.625 r0 top
R20 "33" R0603N 48.825,84.925 r180 top
R21 "33" R0603N 46.125,83.125 r270 top
R22 "10k" R0603N 25.35,72.2 r270 top
R23 "10k" R0603N 23.95,72.2 r90 top
R24 "10k" R0603N 15.275,78.9 r270 top
R25 "10k" R0603N 50.625,88 r270 top
R26 "10k" R0603N 17.45,78.9 r270 top
R27 "10k" R0603N 52.225,88 r270 top
R28 "10k" R0603N 18.85,78.9 r270 top
R29 "10k" R0603N 20.25,78.9 r270 top
R30 "10k" R0603N 34.325,72.2 r270 top
R31 "10k" R0603N 28.15,72.2 r270 top
R32 "10k" R0603N 35.725,72.2 r270 top
R33 "10k" R0603N 37.125,72.2 r270 top
R34 "10k" R0603N 26.75,72.2 r90 top
R35 "10k" R0603N 43.025,85.8 r90 top
R36 "0" R0603N 41.625,82.95 r270 top
R37 "549" R0805N 46.775,32.7 r180 top
R38 "1k" R0603N 55.375,39.575 r270 top
R39 "133" R0805N 50.175,32.7 r180 top
R40 "549" R0805N 53.575,32.7 r180 top
R41 "10k" R0603N 46.575,39.575 r90 top
R42 "10k" R0603N 53.775,39.575 r90 top
R43 "120" R0805N 62.775,35.575 r90 top
R44 "549" R0805N 66.725,32.7 r180 top
R45 "1k" R0603N 75.325,39.575 r270 top
R46 "133" R0805N 70.125,32.7 r180 top
R47 "549" R0805N 73.525,32.7 r180 top
R48 "10k" R0603N 66.525,39.575 r90 top
R49 "10k" R0603N 73.725,39.575 r90 top
R50 "120" R0805N 82.725,35.575 r90 top
R51 "120" R0805N 33.2,63.75 r90 top
R52 "33" R0603N 43.325,64.675 r90 top
R53 "33" R0603N 44.925,64.675 r90 top
R54 "120" R0805N 33.2,54.95 r90 top
R55 "120" R0805N 96.8,63.775 r270 top
R56 "33" R0603N 84.75,66.1 r0 top
R57 "33" R0603N 84.75,67.7 r0 top
R58 "120" R0805N 96.8,54.975 r270 top
R59 "120" R0805N 32.225,32.7 r180 top
R60 "10k" R0603N 30.012,48.037 r0 top
R61 "27k" R0603N 106.625,31.25 r180 top
R62 "1k" R0603N 109.675,31.25 r180 top
R63 "4.02k" R0603N 101.2,45.3 r90 top
R64 "332k" R0603N 106.625,32.85 r0 top
R65 "39.2k" R0603N 104.4,45.3 r90 top
R66 "10.2k" R0603N 107.6,45.3 r270 top
R67 "1.5k" R0603N 77.375,49.85 r0 top
R68 "68.1k" R0603N 108.225,34.45 r0 top
R69 "1.96k" R0603N 106,45.3 r90 top
R70 "0" R0603N 83.525,60.6 r90 top
R71 "10k" R0603N 67.325,46.825 r270 top
R72 "4.99" R0603N 67.325,49.85 r90 top
R73 "12.7k" R0603N 80.425,48.15 r180 top
R74 "0" R0603N 65.725,46.825 r270 top
R75 "10.2k" R0603N 77.375,48.15 r180 top
R76 "31.6k" R0603N 80.425,51.55 r180 top
R77 "10.2k" R0603N 77.375,51.55 r180 top
R78 "10k" R0603N 99,87.975 r90 top
R79 "10k" R0603N 97.6,87.975 r90 top
R80 "10k" R0603N 91.35,72.2 r270 top
R81 "10k" R0603N 89.95,72.2 r90 top
R82 "10k" R0603N 83.45,83.525 r90 top
R83 "10k" R0603N 113.725,82.95 r270 top
R84 "10k" R0603N 83.45,78.9 r270 top
R85 "10k" R0603N 112.125,82.95 r270 top
R86 "10k" R0603N 84.85,78.9 r270 top
R87 "10k" R0603N 86.25,78.9 r270 top
R88 "10k" R0603N 99.75,72.2 r270 top
R89 "10k" R0603N 94.15,72.2 r270 top
R90 "10k" R0603N 101.15,72.2 r270 top
R91 "10k" R0603N 102.55,72.2 r270 top
R92 "10k" R0603N 92.75,72.2 r90 top
R93 "10k" R0603N 109.025,85.8 r90 top
R94 "0" R0603N 107.625,82.95 r270 top
R95 "33" R0603N 123.55,42 r180 top
R96 "33" R0603N 123.55,39.5 r180 top
R97 "33" R0603N 123.55,37 r180 top
R98 "33" R0603N 123.55,32 r180 top
R99 "33" R0603N 123.55,34.5 r180 top
R100 "22k" R0603N 112.725,27 r180 top
R101 "1.5k" R0603N 110.4,68.9 r0 top
R102 "4.3k" R1206N 114.475,76.675 r0 top
R103 "10k" R0603N 110.4,73.25 r0 top
R104 "33" R0603N 107.275,70.6 r0 top
R105 "4.3k" R1206N 114.475,72.075 r0 top
R106 "10k" R0603N 110.4,74.85 r180 top
TP1 "Test_point" TP_RPAD_0.8MM 48.975,88.775 r180 top
TP2 "Test_point" TP_RPAD_0.8MM 47.275,88.775 r180 top
TP3 "Test_point" TP_RPAD_0.8MM 45.575,88.775 r180 top
TP4 "Test_point" TP_RPAD_0.8MM 43.875,88.775 r180 top
TP5 "Test_point" TP_RPAD_0.8MM 42.175,88.775 r180 top
TP6 "Test_point" TP_RPAD_0.8MM 40.475,88.775 r180 top
TP7 "Test_point" TP_RPAD_0.8MM 38.775,88.775 r180 top
TP8 "Test_point" TP_RPAD_0.8MM 37.075,88.775 r180 top
TP9 "Test_point" TP_RPAD_0.8MM 26.95,88.775 r180 top
TP10 "Test_point" TP_RPAD_0.8MM 24.4,88.775 r180 top
TP11 "Test_point" TP_RPAD_0.8MM 21.85,88.775 r180 top
TP12 "Test_point" TP_RPAD_0.8MM 19.3,88.775 r180 top
TP13 "TEST_POINT" TP_RPAD_0.8MM 89.025,49.675 r180 top
TP14 "TEST_POINT" TP_RPAD_0.8MM 82,43.875 r180 top
TP15 "TEST_POINT" TP_RPAD_0.8MM 82,55.825 r180 top
TP16 "Test_point" TP_RPAD_0.8MM 114.975,88.775 r180 top
TP17 "Test_point" TP_RPAD_0.8MM 113.275,88.775 r180 top
TP18 "Test_point" TP_RPAD_0.8MM 111.575,88.775 r180 top
TP19 "Test_point" TP_RPAD_0.8MM 109.875,88.775 r180 top
TP20 "Test_point" TP_RPAD_0.8MM 108.175,88.775 r180 top
TP21 "Test_point" TP_RPAD_0.8MM 106.475,88.775 r180 top
TP22 "Test_point" TP_RPAD_0.8MM 104.775,88.775 r180 top
TP23 "Test_point" TP_RPAD_0.8MM 103.075,88.775 r180 top
TP24 "Test_point" TP_RPAD_0.8MM 92.925,88.775 r180 top
TP25 "Test_point" TP_RPAD_0.8MM 90.4,88.775 r180 top
TP26 "Test_point" TP_RPAD_0.8MM 87.85,88.775 r180 top
TP27 "Test_point" TP_RPAD_0.8MM 85.3,88.775 r180 top
VD1 "SMBJ5.0CA-TR" SMB 46.4,23.45 r90 top
VD2 "SMBJ12CA-TR" SMB 48.7,29.45 r0 top
VD3 "SMBJ5.0CA-TR" SMB 51,23.45 r90 top
VD4 "SMBJ5.0CA-TR" SMB 64.65,16.225 r270 top
VD5 "SMBJ12CA-TR" SMB 60.25,31.625 r180 top
VD6 "SMBJ5.0CA-TR" SMB 69.25,16.225 r270 top
VD7 "SMBJ5.0CA-TR" SMB 79.9,23.45 r90 top
VD8 "SMBJ12CA-TR" SMB 82.2,29.45 r0 top
VD9 "SMBJ5.0CA-TR" SMB 84.5,23.45 r90 top
VD10 "SMBJ5.0CA-TR" SMB 89.1,23.45 r90 top
VD11 "SMBJ12CA-TR" SMB 91.4,29.45 r0 top
VD12 "SMBJ5.0CA-TR" SMB 93.7,23.45 r90 top
VD13 "SMBJ5.0CA-TR" SMB 23.925,61.05 r180 top
VD14 "SMBJ12CA-TR" SMB 29.925,62.45 r90 top
VD15 "SMBJ5.0CA-TR" SMB 23.925,65.65 r180 top
VD16 "SMBJ5.0CA-TR" SMB 23.925,51.85 r180 top
VD17 "SMBJ12CA-TR" SMB 29.925,55.05 r90 top
VD18 "SMBJ5.0CA-TR" SMB 23.925,56.45 r180 top
VD19 "SMBJ5.0CA-TR" SMB 106.075,65.65 r0 top
VD20 "SMBJ12CA-TR" SMB 100.075,62.45 r270 top
VD21 "SMBJ5.0CA-TR" SMB 106.075,61.05 r0 top
VD22 "SMBJ5.0CA-TR" SMB 106.075,56.45 r0 top
VD23 "SMBJ12CA-TR" SMB 100.075,55.05 r270 top
VD24 "SMBJ5.0CA-TR" SMB 106.075,51.85 r0 top
VD25 "SMBJ5.0CA-TR" SMB 32.225,28.05 r270 top
VD26 "SMBJ12CA-TR" SMB 27.8,30.85 r90 top
VD27 "SMBJ5.0CA-TR" SMB 27.8,23.45 r90 top
VD28 "SMBJ5.0CA-TR" SMB 23.2,23.45 r90 top
VD29 "SMBJ12CA-TR" SMB 23.2,30.85 r90 top
VD30 "SMBJ5.0CA-TR" SMB 18.775,28.05 r270 top
VD31 "B550C-13-F" SMC 103.475,15.925 r0 top
VD32 "B340A-13-F" SMA 97.875,38.975 r270 top
VD33 "PMEG10010ELRX" SOD123W 114.475,69.625 r0 top
VD34 "BZT52C4V7-7-F" SOD123 114.475,74.375 r0 top
VD35 "BZT52C4V7-7-F" SOD123 109.525,76.675 r180 top
X1 "DS1013-20S" 2.54_2X10_HEADER_BOX 7,48.2 r90 top
X2 "DS1021-1X2SF11-B" 2.54_2X1_HEADER 51.15,61.3 r0 top
X3 "DS1021-1X4SF11-B" 2.54_4X1_HEADER 48.625,53 r0 top
X4 "DS1021-1X4SF11-B" 2.54_4X1_HEADER 48.625,57.15 r0 top
X5 "DS1023-2X15S21" 2.54_2X15_SOCKET_HEADER 32,94.8 r180 bottom
X6 "15EDGVC-3.5-08P-14-00A(H)" 15EDGVC-3.5-08P-14-00A(H) 54.25,7 r0 top
X7 "15EDGVC-3.5-08P-14-00A(H)" 15EDGVC-3.5-08P-14-00A(H) 87.75,7 r0 top
X8 "15EDGVC-3.5-06P-14-00A(H)" 15EDGVC-3.5-06P-14-00A(H) 7.5,76.75 r270 top
X9 "15EDGVC-3.5-06P-14-00A(H)" 15EDGVC-3.5-06P-14-00A(H) 122.5,76.75 r90 top
X10 "15EDGVC-3.5-05P-14-00A(H)" 15EDGVC-3.5-05P-14-00A(H) 25.5,7 r0 top
X11 "2EDGR-5.0-02P-14-00A(H)" 2EDGR-5.0-02P-14-00A(H) 113.5,15.05 r0 top
X12 "DS1023-2X15S21" 2.54_2X15_SOCKET_HEADER 98,94.8 r180 bottom
X13 "B7B-XH-A(LF)(SN)" B7B-XH-A 118,34.5 r270 top
X14 "15EDGVC-3.5-03P-14-00A(H)" 15EDGVC-3.5-03P-14-00A(H) 122.5,55 r90 top
ZQ1 "25MHz" NX3225GA 69.475,60.4 r0 top
ZQ2 "32768kHz" NX3215SA 61.75,60.9 r180 top

## Footprints (in the part's own frame and the unit in brackets; to place one, negate y for a bottom-side part, rotate by r counter-clockwise, add the part's x,y. Pads: shape width x height; smd on the part's side, far side on the other; paste and mask are expansions set on the pad)
2.54_2X1_HEADER [mm] "Header 2.54mm pitch, 2 pos, 1 row"
  rrect30% 1.6x1.6 hole 1.1: 1(-1.27,0)
  round 1.6 hole 1.1: 2(1.27,0)
  silkscreen extent -2.5,-2.52 2.54,1.2, body extent -2.54,-1.27 2.54,1.27, height 8.57
2.54_2X10_HEADER_BOX [mm] "20 pin, 2x10, 2.54 mm pitch Male Box Header"
  rrect20% 1.5x1.5 hole 1: 1(-11.43,-1.27)
  round 1.5 hole 1: 2(-11.43,1.27) 3(-8.89,-1.27) 4(-8.89,1.27) 5(-6.35,-1.27) 6(-6.35,1.27) 7(-3.81,-1.27) 8(-3.81,1.27) 9(-1.27,-1.27) 10(-1.27,1.27) 11(1.27,-1.27) 12(1.27,1.27) 13(3.81,-1.27) 14(3.81,1.27) 15(6.35,-1.27) 16(6.35,1.27) 17(8.89,-1.27) 18(8.89,1.27) 19(11.43,-1.27) 20(11.43,1.27)
  silkscreen extent -16.51,-5.75 16.51,4.57, body extent -16.53,-4.42 16.53,4.75, height 9.13
2.54_2X15_SOCKET_HEADER [mm] "30 pin, 2x15, 2.54 mm pitch Female Header"
  rrect20% 1.5x1.5 hole 1: 1(-17.78,-1.27)
  round 1.5 hole 1: 2(-17.78,1.27) 3(-15.24,-1.27) 4(-15.24,1.27) 5(-12.7,-1.27) 6(-12.7,1.27) 7(-10.16,-1.27) 8(-10.16,1.27) 9(-7.62,-1.27) 10(-7.62,1.27) 11(-5.08,-1.27) 12(-5.08,1.27) 13(-2.54,-1.27) 14(-2.54,1.27) 15(0,-1.27) 16(0,1.27) 17(2.54,-1.27) 18(2.54,1.27) 19(5.08,-1.27) 20(5.08,1.27) 21(7.62,-1.27) 22(7.62,1.27) 23(10.16,-1.27) 24(10.16,1.27) 25(12.7,-1.27) 26(12.7,1.27) 27(15.24,-1.27) 28(15.24,1.27) 29(17.78,-1.27) 30(17.78,1.27)
  silkscreen extent -19.3,-3.8 19.3,2.5, body extent -19.3,-2.52 19.3,2.48, height 8.5
2.54_4X1_HEADER [mm] "Header 2.54mm pitch, 4 pos, 1 row"
  rrect30% 1.6x1.6 hole 1.1: 1(-3.81,0)
  round 1.6 hole 1.1: 2(-1.27,0) 3(1.27,0) 4(3.81,0)
  silkscreen extent -5.04,-2.52 5.08,1.2, body extent -5.08,-1.27 5.08,1.27, height 8.57
2EDGR-5.0-02P-14-00A(H) [mm] "Pluggable terminal block, 5.0mm pitch, angled 90, 2 position"
  rrect10% 2.2x2.2 hole 1.6: 1(-2.5,4.45)
  round 2.2 hole 1.6: 2(2.5,4.45)
  silkscreen extent -5.07,-6.12 5.08,7.47, body extent -5,-6.05 5,6.05, height 8.2
15EDGVC-3.5-03P-14-00A(H) [mm] "Pluggable terminal block, 3.5mm pitch, straight, 3 position"
  rrect10% 2x2 hole 1.4: 1(-3.5,0)
  round 2 hole 1.4: 2(0,0) 3(3.5,0)
  silkscreen extent -5.72,-3.08 5.73,5.42, body extent -5.65,-3 5.65,4.24, height 9.2
15EDGVC-3.5-05P-14-00A(H) [mm] "Pluggable terminal block, 3.5mm pitch, straight, 5 position"
  rrect10% 2x2 hole 1.4: 1(-7,0)
  round 2 hole 1.4: 2(-3.5,0) 3(0,0) 4(3.5,0) 5(7,0)
  silkscreen extent -9.23,-3.08 9.23,5.42, body extent -9.15,-3 9.15,4.2, height 9.2
15EDGVC-3.5-06P-14-00A(H) [mm] "Pluggable terminal block, 3.5mm pitch, straight, 6 position"
  rrect10% 2x2 hole 1.4: 1(-8.75,0)
  round 2 hole 1.4: 2(-5.25,0) 3(-1.75,0) 4(1.75,0) 5(5.25,0) 6(8.75,0)
  silkscreen extent -10.97,-3.08 10.98,5.42, body extent -10.9,-3 10.9,4.2, height 9.2
15EDGVC-3.5-08P-14-00A(H) [mm] "Pluggable terminal block, 3.5mm pitch, straight, 8 position"
  rrect10% 2x2 hole 1.4: 1(-12.25,0)
  round 2 hole 1.4: 2(-8.75,0) 3(-5.25,0) 4(-1.75,0) 5(1.75,0) 6(5.25,0) 7(8.75,0) 8(12.25,0)
  silkscreen extent -14.47,-3.08 14.48,5.42, body extent -14.4,-3 14.4,4.2, height 9.2
ASE [mm] "3.2x2.5mm Crystal Oscillator ASE Series"
  rrect10% 1.3x1.1 smd: 1(-1.05,-0.825) 2(1.05,-0.825) 3(1.05,0.825) 4(-1.05,0.825)
  silkscreen extent -2.12,-1.78 1.95,1.63, body extent -1.6,-1.25 1.6,1.25, height 1.25
B7B-XH-A [mm] "Connector Header Through Hole 7 position 0.098\" (2.50mm)"
  rrect10% 1.4x1.4 hole 0.9: 1(-7.5,0)
  round 1.4 hole 0.9: 2(-5,0) 3(-2.5,0) 4(0,0) 5(2.5,0) 6(5,0) 7(7.5,0)
  silkscreen extent -10.02,-3.47 10.02,3.77, body extent -9.95,-3.4 9.95,2.35, height 7
C0603N [mm]
  rrect40% 0.8x0.95 smd: 1(-0.8,0) 2(0.8,0)
  silkscreen extent -1.43,-0.7 1.43,0.7, body extent -0.8,-0.4 0.8,0.4, height 0.81
C0805N [mm]
  rrect40% 0.95x1.4 smd: 1(-0.9,0) 2(0.9,0)
  silkscreen extent -1.58,-0.9 1.58,0.9, body extent -1,-0.62 1,0.63, height 1.26
C1206N [mm]
  rrect20% 1.15x1.8 smd: 1(-1.45,0) 2(1.45,0)
  silkscreen extent -2.25,-1.12 2.25,1.12, body extent -1.6,-0.8 1.6,0.8, height 1.61
C1808N [mm] "1808 Package, 4.50mm x 2.00mm"
  rrect20% 1.05x2.3 smd: 1(-2.175,0) 2(2.175,0)
  silkscreen extent -2.9,-1.35 2.9,1.35, body extent -2.25,-1 2.25,1, height 2
FB0603N [mm] "Ferrite Bead 0603"
  rrect40% 0.8x0.95 smd: 1(-0.8,0) 2(0.8,0)
  silkscreen extent -1.43,-0.7 1.43,0.7, body extent -0.8,-0.4 0.8,0.4, height 0.8
GDT_3PIN_B2 [mm] "3-pin GDT with 4.4mm spacing"
  round 1.75 hole 1.25: 1(-4.4,0) 2(0,0) 3(4.4,0)
  silkscreen extent -5.75,-3.75 5.75,3.75, body extent -5.75,-3.75 5.75,3.75, height 7.55
KR-5R5H155-R [mm] "Coin Cell Supercapacitor"
  round 2.1 hole 1.5: 1(-10,0) 2(10,0)
  silkscreen extent -9.88,-10 9.88,10, body extent -9.5,-9.5 9.5,9.5, height 6.71
LED0603 [mm] "LED SMD 0603"
  rrect40% 0.8x0.95 smd: 1(-0.8,0) 2(0.8,0)
  silkscreen extent -1.43,-0.7 1.43,0.7, body extent -0.8,-0.4 0.8,0.4, height 0.7
LQFP144 [mm] "LQFP, 144-pin, 20x20 mm low profile quad flat package"
  rrect30% 0.35x1.35 smd mask+0.07: 1(-8.75,-10.625) 2(-8.25,-10.625) 3(-7.75,-10.625) 4(-7.25,-10.625) 5(-6.75,-10.625) 6(-6.25,-10.625) 7(-5.75,-10.625) 8(-5.25,-10.625) 9(-4.75,-10.625) 10(-4.25,-10.625) 11(-3.75,-10.625) 12(-3.25,-10.625) 13(-2.75,-10.625) 14(-2.25,-10.625) 15(-1.75,-10.625) 16(-1.25,-10.625) 17(-0.75,-10.625) 18(-0.25,-10.625) 19(0.25,-10.625) 20(0.75,-10.625) 21(1.25,-10.625) 22(1.75,-10.625) 23(2.25,-10.625) 24(2.75,-10.625) 25(3.25,-10.625) 26(3.75,-10.625) 27(4.25,-10.625) 28(4.75,-10.625) 29(5.25,-10.625) 30(5.75,-10.625) 31(6.25,-10.625) 32(6.75,-10.625) 33(7.25,-10.625) 34(7.75,-10.625) 35(8.25,-10.625) 36(8.75,-10.625) 73(8.75,10.625) 74(8.25,10.625) 75(7.75,10.625) 76(7.25,10.625) 77(6.75,10.625) 78(6.25,10.625) 79(5.75,10.625) 80(5.25,10.625) 81(4.75,10.625) 82(4.25,10.625) 83(3.75,10.625) 84(3.25,10.625) 85(2.75,10.625) 86(2.25,10.625) 87(1.75,10.625) 88(1.25,10.625) 89(0.75,10.625) 90(0.25,10.625) 91(-0.25,10.625) 92(-0.75,10.625) 93(-1.25,10.625) 94(-1.75,10.625) 95(-2.25,10.625) 96(-2.75,10.625) 97(-3.25,10.625) 98(-3.75,10.625) 99(-4.25,10.625) 100(-4.75,10.625) 101(-5.25,10.625) 102(-5.75,10.625) 103(-6.25,10.625) 104(-6.75,10.625) 105(-7.25,10.625) 106(-7.75,10.625) 107(-8.25,10.625) 108(-8.75,10.625)
  rrect30% 1.35x0.35 smd mask+0.07: 37(10.625,-8.75) 38(10.625,-8.25) 39(10.625,-7.75) 40(10.625,-7.25) 41(10.625,-6.75) 42(10.625,-6.25) 43(10.625,-5.75) 44(10.625,-5.25) 45(10.625,-4.75) 46(10.625,-4.25) 47(10.625,-3.75) 48(10.625,-3.25) 49(10.625,-2.75) 50(10.625,-2.25) 51(10.625,-1.75) 52(10.625,-1.25) 53(10.625,-0.75) 54(10.625,-0.25) 55(10.625,0.25) 56(10.625,0.75) 57(10.625,1.25) 58(10.625,1.75) 59(10.625,2.25) 60(10.625,2.75) 61(10.625,3.25) 62(10.625,3.75) 63(10.625,4.25) 64(10.625,4.75) 65(10.625,5.25) 66(10.625,5.75) 67(10.625,6.25) 68(10.625,6.75) 69(10.625,7.25) 70(10.625,7.75) 71(10.625,8.25) 72(10.625,8.75) 109(-10.625,8.75) 110(-10.625,8.25) 111(-10.625,7.75) 112(-10.625,7.25) 113(-10.625,6.75) 114(-10.625,6.25) 115(-10.625,5.75) 116(-10.625,5.25) 117(-10.625,4.75) 118(-10.625,4.25) 119(-10.625,3.75) 120(-10.625,3.25) 121(-10.625,2.75) 122(-10.625,2.25) 123(-10.625,1.75) 124(-10.625,1.25) 125(-10.625,0.75) 126(-10.625,0.25) 127(-10.625,-0.25) 128(-10.625,-0.75) 129(-10.625,-1.25) 130(-10.625,-1.75) 131(-10.625,-2.25) 132(-10.625,-2.75) 133(-10.625,-3.25) 134(-10.625,-3.75) 135(-10.625,-4.25) 136(-10.625,-4.75) 137(-10.625,-5.25) 138(-10.625,-5.75) 139(-10.625,-6.25) 140(-10.625,-6.75) 141(-10.625,-7.25) 142(-10.625,-7.75) 143(-10.625,-8.25) 144(-10.625,-8.75)
  silkscreen extent -11.53,-11.53 11.53,11.53, body extent -11,-11 11,11, height 1.6
MF-MSMF [mm]
  rrect10% 1.7x3 smd: 1(-2.4,0) 2(2.4,0)
  silkscreen extent -3.7,-1.9 3.7,1.9, body extent -2.36,-1.7 2.37,1.71, height 0.85
MH_3.2_5.4_PLATED_VIA [mm] "Mounting Hole, 3.2mm/5.4mm dia., Plated, with Via Stiching"
  round 5.4 hole 3.2: 1(0,0)
  silkscreen extent -2.9,-2.9 2.9,2.9
NX3215SA [mm] "Crystal Unit, 3.20mm x 1.50mm"
  rrect10% 1x1.8 smd: 1(-1.25,0) 2(1.25,0)
  silkscreen extent -1.97,-1.12 1.97,1.12, body extent -1.65,-0.8 1.65,0.8, height 0.89
NX3225GA [mm] "Crystal Unit, 3.20mm x 2.50mm"
  rrect10% 1.4x1.2 smd: 1(-1.1,-0.8) 2(-1.1,0.8) 2(1.1,-0.8) 3(1.1,0.8)
  silkscreen extent -2.02,-1.63 2.02,1.63, body extent -1.65,-1.29 1.65,1.3, height 0.74
QFN76-EP [mm] "QFN76 with Exposed Pad"
  oval 0.8x0.2 smd mask+0.051: 1(-5.15,2.6) 14(-5.15,-2.6) 39(5.15,-2.6) 52(5.15,2.6)
  oval 0.85x0.2 smd mask+0.051: 2(-5.15,2.2) 3(-5.15,1.8) 4(-5.15,1.4) 5(-5.15,1) 6(-5.15,0.6) 7(-5.15,0.2) 8(-5.15,-0.2) 9(-5.15,-0.6) 10(-5.15,-1) 11(-5.15,-1.4) 12(-5.15,-1.8) 13(-5.15,-2.2) 40(5.15,-2.2) 41(5.15,-1.8) 42(5.15,-1.4) 43(5.15,-1) 44(5.15,-0.6) 45(5.15,-0.2) 46(5.15,0.2) 47(5.15,0.6) 48(5.15,1) 49(5.15,1.4) 50(5.15,1.8) 51(5.15,2.2)
  oval 0.2x0.8 smd mask+0.051: 15(-4.6,-3.15) 38(4.6,-3.15) 53(4.6,3.15) 76(-4.6,3.15)
  oval 0.2x0.85 smd mask+0.051: 16(-4.2,-3.15) 17(-3.8,-3.15) 18(-3.4,-3.15) 19(-3,-3.15) 20(-2.6,-3.15) 21(-2.2,-3.15) 22(-1.8,-3.15) 23(-1.4,-3.15) 24(-1,-3.15) 25(-0.6,-3.15) 26(-0.2,-3.15) 27(0.2,-3.15) 28(0.6,-3.15) 29(1,-3.15) 30(1.4,-3.15) 31(1.8,-3.15) 32(2.2,-3.15) 33(2.6,-3.15) 34(3,-3.15) 35(3.4,-3.15) 36(3.8,-3.15) 37(4.2,-3.15) 54(4.2,3.15) 55(3.8,3.15) 56(3.4,3.15) 57(3,3.15) 58(2.6,3.15) 59(2.2,3.15) 60(1.8,3.15) 61(1.4,3.15) 62(1,3.15) 63(0.6,3.15) 64(0.2,3.15) 65(-0.2,3.15) 66(-0.6,3.15) 67(-1,3.15) 68(-1.4,3.15) 69(-1.8,3.15) 70(-2.2,3.15) 71(-2.6,3.15) 72(-3,3.15) 73(-3.4,3.15) 74(-3.8,3.15) 75(-4.2,3.15)
  rect 9x5 smd: 77(0,0)
  silkscreen extent -5.72,-3.72 5.72,3.72, body extent -5.25,-3.25 5.25,3.25, height 0.9
R0603N [mm]
  rrect40% 0.8x0.95 smd: 1(-0.8,0) 2(0.8,0)
  silkscreen extent -1.43,-0.7 1.43,0.7, body extent -0.8,-0.4 0.8,0.4, height 0.45
R0805N [mm]
  rrect40% 0.95x1.4 smd: 1(-0.9,0) 2(0.9,0)
  silkscreen extent -1.58,-0.9 1.58,0.9, body extent -1,-0.62 1,0.62, height 0.56
R1206N [mm]
  rrect20% 1.15x1.8 smd: 1(-1.45,0) 2(1.45,0)
  silkscreen extent -2.25,-1.12 2.25,1.12, body extent -1.55,-0.8 1.55,0.8, height 0.65
RUM0016A [mm] "WQFN16 with Exposed Pad"
  rrect30% 0.6x0.3 smd mask+0.07: 1(-1.9,0.975) 2(-1.9,0.325) 3(-1.9,-0.325) 4(-1.9,-0.975) 9(1.9,-0.975) 10(1.9,-0.325) 11(1.9,0.325) 12(1.9,0.975)
  rrect30% 0.3x0.6 smd mask+0.07: 5(-0.975,-1.9) 6(-0.325,-1.9) 7(0.325,-1.9) 8(0.975,-1.9) 13(0.975,1.9) 14(0.325,1.9) 15(-0.325,1.9) 16(-0.975,1.9)
  rrect5% 2.6x2.6 smd paste-20 mask+0.07: 17(0,0)
  silkscreen extent -2.4,-2.4 2.4,2.4, body extent -2,-2 2,2, height 0.8
SMA [mm] "SMA Package"
  rrect30% 2x2 smd: 1(-2,0) 2(2,0)
  silkscreen extent -2.3,-1.45 2.3,1.45, body extent -2.56,-1.35 2.56,1.35, height 1.96
SMB [mm] "SMB Package"
  rrect30% 2.159x2.743 smd: 1(-2.21,0) 2(2.21,0)
  silkscreen extent -2.3,-1.98 2.3,1.97, body extent -2.72,-1.78 2.72,1.78, height 2.31
SMC [mm] "SMC Package"
  rrect30% 2.4x3.3 smd: 1(-3.1,0) 2(3.1,0)
  silkscreen extent -4,-3.1 4,3.1, body extent -4,-3.1 4,3.1, height 2.5
SOD123 [mm] "SOD?123 CASE 425?04 ISSUE G"
  rrect10% 0.85x0.85 smd: 1(-1.65,0) 2(1.65,0)
  silkscreen extent -2.27,-0.8 2.27,0.8, body extent -1.85,-0.77 1.85,0.78, height 1.25
SOD123W [mm] "SOD123W (CFP3) Package"
  rrect10% 1.2x1.2 smd: 1(-1.4,0) 2(1.4,0)
  silkscreen extent -2.2,-0.8 2.2,0.8, body extent -1.85,-0.95 1.85,0.95, height 1.1
SOIC8 [mm] "SOIC8 - 1.75 mm max height"
  rrect30% 1.55x0.6 smd: 1(-2.7,1.905) 2(-2.7,0.635) 3(-2.7,-0.635) 4(-2.7,-1.905) 5(2.7,-1.905) 6(2.7,-0.635) 7(2.7,0.635) 8(2.7,1.905)
  silkscreen extent -1.63,-2.5 1.63,2.5, body extent -3.07,-2.44 3.07,2.45, height 1.73
SOIC8-EP [mm] "SOIC8 with Exposed Pad"
  rrect30% 1.55x0.6 smd: 1(-2.7,1.905) 2(-2.7,0.635) 3(-2.7,-0.635) 4(-2.7,-1.905) 5(2.7,-1.905) 6(2.7,-0.635) 7(2.7,0.635) 8(2.7,1.905)
  rrect5% 2.62x3.51 smd: 9(0,0)
  silkscreen extent -4.02,-2.5 1.63,2.79, body extent -2.98,-2.45 2.98,2.45, height 1.51
SOIC16_IC [mm] "SOIC16 Increased Creepage"
  rrect30% 0.6x1.65 smd: 1(-4.445,-4.875) 2(-3.175,-4.875) 3(-1.905,-4.875) 4(-0.635,-4.875) 5(0.635,-4.875) 6(1.905,-4.875) 7(3.175,-4.875) 8(4.445,-4.875) 9(4.445,4.875) 10(3.175,4.875) 11(1.905,4.875) 12(0.635,4.875) 13(-0.635,4.875) 14(-1.905,4.875) 15(-3.175,4.875) 16(-4.445,4.875)
  silkscreen extent -6.42,-6.2 6.43,3.8, body extent -6.38,-5.25 6.37,5.26, height 2.64
SOT363-2 [mm] "SC70-6"
  rrect30% 0.4x0.95 smd: 1(-0.65,-1.1) 2(0,-1.1) 3(0.65,-1.1) 4(0.65,1.1) 5(0,1.1) 6(-0.65,1.1)
  silkscreen extent -1.42,-1.27 1.15,0.45, body extent -1,-1.05 1,1.05, height 1
SRN8040 [mm] "SRN8040 Series - Semi-shielded Power Inductors"
  rrect15% 2.6x8.2 smd: 1(-2.8,0) 2(2.8,0)
  silkscreen extent -4.33,-4.33 4.33,4.33, body extent -4.07,-3.95 4.08,3.95, height 4
TBU-CA [mm] "TBU® High-Speed Protectors"
  rrect5% 1.85x3.4 smd mask+0.07: 1(-2.025,0) 3(2.025,0)
  rrect5% 0.8x3.4 smd mask+0.07: 2(0,0)
  silkscreen extent -3.4,-2.15 3.4,2.15, body extent -3.25,-2 3.25,2, height 0.85
TP_RPAD_0.8MM [mm] "Test Point, Round Pad 0.8mm dia."
  round 0.8 smd: 1(0,0)
  silkscreen extent -0.6,-0.6 0.6,0.6
VLS3012HBX [mm] "Power Inductor"
  rrect30% 1x3.4 smd: 1(-1.05,0) 2(1.05,0)
  silkscreen extent -1.78,-1.92 1.78,1.92, body extent -1.5,-1.51 1.5,1.51, height 1.19

## Part data
C1 C2 C82: library part CC0603CRNPO9BN6R8, "Конденсатор", Артикул=CC0603CRNPO9BN6R8, Вид монтажа=SMD, Диэлектрик=NP0, Корпус="0603 (1608 Metric)", Напряжение=50V, Номинал=6.8pF, Производитель=YAGEO, Строка для документации=https://www.yageo.com/upload/media/product/productsearch/datasheet/mlcc/UPY-GP_NP0_16V-to-50V_18.pdf, Температурный диапазон="-55°C ~ 125°C", Тип элемента=Конденсатор, Точность=±0.25pF
  C1 C2: Описание="4.7 pF ±0.25pF 50V Ceramic Capacitor C0G, NP0 0603 (1608 Metric)"
  C82: Описание="6.8 pF ±0.25pF 50V Ceramic Capacitor C0G, NP0 0603 (1608 Metric)"
C3 C9 C10 C12 C13 C14 C15 C16 C17 C18 C19 C20 C21 C22 C23 C25 C26 C27 C28 C30 C31 C32 C33 C34 C35 C38 C39 C41 C43 C45 C47 C49 C51 C53 C54 C56 C58 C59 C61 C62 C65 C67 C68 C76 C91 C92 C93 C94 C95 C96 C97 C98 C99 C100 C103 C104 C106 C108 C109 C110 C111 C113: library part CL10B104KB8NNNC, "Конденсатор", Артикул=CL10B104KB8NNNC, Вид монтажа=SMD, Диэлектрик=X7R, Корпус="0603 (1608 Metric)", Напряжение=50V, Номинал=0.1uF, Описание="0.1 µF ±10% 50V Ceramic Capacitor X7R 0603 (1608 Metric)", Производитель="Samsung Electro-Mechanics", Строка для документации=https://mm.digikey.com/Volume0/opasdata/d220001/medias/docus/609/CL10B104KB8NNNC_Spec.pdf, Температурный диапазон="-55°C ~ 125°C", Тип элемента=Конденсатор, Точность=10%
C4: library part KR-5R5H155-R, "Ионистор", Артикул=KR-5R5H155-R, Вид монтажа="Through Hole", Диэлектрик=EDLC, Корпус="19.00mm dia x 6.5mm", Напряжение=5.5V, Номинал=1.5F, Описание="1.5 F (EDLC) Supercapacitor 5.5 V Axial, Can - Horizontal 30Ohm @ 1kHz 1000 Hrs @ 70°C", Производитель="Eaton - Electronics Division", Строка для документации=https://www.eaton.com/content/dam/eaton/products/electronic-components/resources/data-sheet/eaton-kr-supercapacitors-coin-cells-data-sheet.pdf, Температурный диапазон="-25°C ~ 70°C", Тип элемента=Конденсатор, Точность="-20%, +80%"
C5 C6: library part CL10A225KO8NNNC, "Конденсатор", Артикул=CL10A225KO8NNNC, Вид монтажа=SMD, Диэлектрик=X5R, Корпус="0603 (1608 Metric)", Напряжение=16V, Номинал=2.2uF, Описание="2.2 µF ±10% 16V Ceramic Capacitor X5R 0603 (1608 Metric)", Производитель="Samsung Electro-Mechanics", Строка для документации=https://mm.digikey.com/Volume0/opasdata/d220001/medias/docus/421/CL10A225KO8NNNC_Spec.pdf, Температурный диапазон="-55°C ~ 85°C", Тип элемента=Конденсатор, Точность=10%
C7 C8: library part CC0603CRNPO9BN4R7, "Конденсатор", Артикул=CC0603CRNPO9BN4R7, Вид монтажа=SMD, Диэлектрик=NP0, Корпус="0603 (1608 Metric)", Напряжение=50V, Номинал=4.7pF, Описание="4.7 pF ±0.25pF 50V Ceramic Capacitor C0G, NP0 0603 (1608 Metric)", Производитель=YAGEO, Строка для документации=https://www.yageo.com/upload/media/product/productsearch/datasheet/mlcc/UPY-GP_NP0_16V-to-50V_18.pdf, Температурный диапазон="-55°C ~ 125°C", Тип элемента=Конденсатор, Точность=±0.25pF
C11 C24 C42 C44 C46 C48 C50 C52 C55 C57 C60 C107: library part CL10A475KO8NNNC, "Конденсатор", Артикул=CL10A475KO8NNNC, Вид монтажа=SMD, Диэлектрик=X5R, Корпус="0603 (1608 Metric)", Напряжение=16V, Номинал=4.7uF, Описание="4.7 µF ±10% 16V Ceramic Capacitor X5R 0603 (1608 Metric)", Производитель="Samsung Electro-Mechanics", Строка для документации=https://mm.digikey.com/Volume0/opasdata/d220001/medias/docus/2328/CL10A475KO8NNNC_Spec.pdf, Температурный диапазон="-55°C ~ 85°C", Тип элемента=Конденсатор, Точность=10%
C29 C63 C66 C112: library part CL10B103KB8NNNC, "Конденсатор", Артикул=CL10B103KB8NNNC, Вид монтажа=SMD, Диэлектрик=X7R, Корпус="0603 (1608 Metric)", Напряжение=16V, Номинал=10nF, Описание="10000 pF ±10% 50V Ceramic Capacitor X7R 0603 (1608 Metric)", Производитель="Samsung Electro-Mechanics", Строка для документации=https://mm.digikey.com/Volume0/opasdata/d220001/medias/docus/609/CL10B103KB8NNNC_Spec.pdf, Температурный диапазон="-55°C ~ 125°C", Тип элемента=Конденсатор, Точность=10%
C36 C37 C79 C80 C85 C86 C89 C90 C101 C102: library part CL21A226MOCLRNC, "Конденсатор", Артикул=CL21A226MOCLRNC, Вид монтажа=SMD, Диэлектрик=X5R, Корпус="0805 (2012 Metric)", Напряжение=16V, Номинал=22uF, Описание="22 µF ±20% 16V Ceramic Capacitor X5R 0805 (2012 Metric)", Производитель="Samsung Electro-Mechanics", Строка для документации=https://mm.digikey.com/Volume0/opasdata/d220001/medias/docus/43/CL21A226MOCLRNC_Spec.pdf, Температурный диапазон="-55°C ~ 85°C", Тип элемента=Конденсатор, Точность=20%
C40 C105: library part CL10B105KO8NNNC, "Конденсатор", Артикул=CL10B105KO8NNNC, Вид монтажа=SMD, Диэлектрик=X7R, Корпус="0603 (1608 Metric)", Напряжение=16V, Номинал=1uF, Описание="1 µF ±10% 16V Ceramic Capacitor X7R 0603 (1608 Metric)", Производитель=YAGEO, Строка для документации=https://weblib.samsungsem.com/mlcc/mlcc-ec-data-sheet.do?partNumber=CL10B105KO8NNN, Температурный диапазон="-55°C ~ 125°C", Тип элемента=Конденсатор, Точность=10%
C64 C69 C84 C88: library part CL21A106KAYNNNE, "Конденсатор", Артикул=CL21A106KAYNNNE, Вид монтажа=SMD, Диэлектрик=X5R, Корпус="0805 (2012 Metric)", Напряжение=25V, Номинал=10uF, Описание="10 µF ±10% 25V Ceramic Capacitor X5R 0805 (2012 Metric)", Производитель="Samsung Electro-Mechanics", Строка для документации=https://mm.digikey.com/Volume0/opasdata/d220001/medias/docus/5545/CL21A106KAYNNNE%20Spec.pdf, Температурный диапазон="-55°C ~ 85°C", Тип элемента=Конденсатор, Точность=10%
C70 C71: library part GA342DR7GF102KW02L, "Конденсатор", Артикул=GA342DR7GF102KW02L, Вид монтажа=SMD, Диэлектрик=X7R, Корпус="1808 (4520 Metric)", Напряжение=250VAC, Номинал=1nF, Описание="1000 pF ±10% 250VAC Ceramic Capacitor X7R 1808 (4520 Metric)", Производитель="Murata Electronics", Строка для документации=https://search.murata.co.jp/Ceramy/image/img/A01X/G101/ENG/GA342DR7GF102KW02-01.pdf, Температурный диапазон="-55°C ~ 125°C", Тип элемента=Конденсатор, Точность=10%
C72 C74: library part CL21B104KCFNNNE, "Конденсатор", Артикул=CL21B104KCFNNNE, Вид монтажа=SMD, Диэлектрик=X7R, Корпус="0805 (2012 Metric)", Напряжение=100V, Номинал=0.1uF, Описание="0.1 µF ±10% 100V Ceramic Capacitor X7R 0805 (2012 Metric)", Производитель="Samsung Electro-Mechanics", Строка для документации=https://mm.digikey.com/Volume0/opasdata/d220001/medias/docus/893/CL21B104KCFNNNE_Spec.pdf, Температурный диапазон="-55°C ~ 125°C", Тип элемента=Конденсатор, Точность=10%
C73 C75 C77 C78: library part CL31B106KBHNNNE, "Конденсатор", Артикул=CL31B106KBHNNNE, Вид монтажа=SMD, Диэлектрик=X7R, Корпус="1206 (3216 Metric)", Напряжение=50V, Номинал=10uF, Описание="10 µF ±10% 50V Ceramic Capacitor X7R 1206 (3216 Metric)", Производитель="Samsung Electro-Mechanics", Строка для документации=https://mm.digikey.com/Volume0/opasdata/d220001/medias/docus/41/CL31B106KBHNNNE_Spec.pdf, Температурный диапазон="-55°C ~ 125°C", Тип элемента=Конденсатор, Точность=10%
C81: library part CL10B102KC8NNNC, "Конденсатор", Артикул=CL10B102KC8NNNC, Вид монтажа=SMD, Диэлектрик=X7R, Корпус="0603 (1608 Metric)", Напряжение=100V, Номинал=1nF, Описание="1000 pF ±10% 100V Ceramic Capacitor X7R 0603 (1608 Metric)", Производитель="Samsung Electro-Mechanics", Строка для документации=https://mm.digikey.com/Volume0/opasdata/d220001/medias/docus/1136/CL10B102KC8NNNC_Spec.pdf, Температурный диапазон="-55°C ~ 125°C", Тип элемента=Конденсатор, Точность=10%
C83: library part CC0603KRX7R9BB822, "Конденсатор", Артикул=CC0603KRX7R9BB822, Вид монтажа=SMD, Диэлектрик=X7R, Корпус="0603 (1608 Metric)", Напряжение=50V, Номинал=8.2nF, Описание="8200 pF ±10% 50V Ceramic Capacitor X7R 0603 (1608 Metric)", Производитель=YAGEO, Строка для документации=https://www.yageo.com/upload/media/product/productsearch/datasheet/mlcc/UPY-GPHC_X7R_6.3V-to-250V_23.pdf, Температурный диапазон="-55°C ~ 125°C", Тип элемента=Конденсатор, Точность=10%
C87: library part CL10B474KA8NNNC, "Конденсатор", Артикул=CL10B474KA8NNNC, Вид монтажа=SMD, Диэлектрик=X7R, Корпус="0603 (1608 Metric)", Напряжение=25V, Номинал=0.47uF, Описание="0.47 µF ±10% 25V Ceramic Capacitor X7R 0603 (1608 Metric)", Производитель="Samsung Electro-Mechanics", Строка для документации=https://mm.digikey.com/Volume0/opasdata/d220001/medias/docus/41/CL10B474KA8NNNC_Spec.pdf, Температурный диапазон="-55°C ~ 125°C", Тип элемента=Конденсатор, Точность=10%
DA1 DA2 DA3 DA4 DA5 DA6 DA7 DA8 DA9: "Микросхема интерфейса RS485", Вид монтажа=SMD, Температурный диапазон="-40°C ~ 85°C", Тип элемента=Микросхема
  DA1 DA3: Артикул=ADM4852ARZ, Корпус="8-SOIC (0.154\", 3.90mm Width)", Описание="1/1 Transceiver Half RS422, RS485 8-SOIC", Производитель="\"D:\Altium\Libraries\GOST_LIBS\Libraries\IC\Analog Devices\ADM4852A.SchLib\"", Строка для документации=https://www.analog.com/media/en/technical-documentation/data-sheets/ADM4850_4851_4852_4853_4854_4855_4856_4857.pdf
  DA2 DA4 DA5 DA6 DA7 DA8: Артикул=ADM4857ARZ, Корпус="8-SOIC (0.154\", 3.90mm Width)", Описание="1/1 Transceiver Full RS422, RS485 8-SOIC", Производитель="\"D:\Altium\Libraries\GOST_LIBS\Libraries\IC\Analog Devices\ADM4852A.SchLib\"", Строка для документации=https://www.analog.com/media/en/technical-documentation/data-sheets/ADM4850_4851_4852_4853_4854_4855_4856_4857.pdf
  DA9: Артикул=ADM2687EBRIZ, Корпус="16-SOIC (0.295\", 7.50mm Width)", Описание="RS422, RS485 Digital Isolator 5000Vrms 3 Channel 500kbps 25kV/µs CMTI 16-SOIC (0.295\", 7.50mm Width)", Производитель="Analog Devices Inc.", Строка для документации=https://www.analog.com/media/en/technical-documentation/data-sheets/ADM2682E_2687E.pdf
DA10: "Микросхема понижающего преобразователя", Артикул=TPS54332DDAR, Вид монтажа=SMD, Корпус="8-PowerSOIC (0.154\", 3.90mm Width)", Описание="Buck Switching Regulator IC Positive Adjustable 0.8V 1 Output 3.5A 8-PowerSOIC (0.154\", 3.90mm Width)", Производитель="Texas Instruments", Строка для документации=https://www.ti.com/lit/ds/symlink/tps54332.pdf, Температурный диапазон="-40°C ~ 150°C (TJ)", Тип элемента=Микросхема
DD1: "Микросхема микроконтроллер", Артикул=STM32H743ZIT6, Вид монтажа=SMD, Корпус="144-LQFP (20x20)", Описание="ARM® Cortex®-M7 STM32H7 Microcontroller IC 32-Bit Single-Core 480MHz 2MB (2M x 8) FLASH 144-LQFP (20x20)", Производитель=STMicroelectronics, Строка для документации=https://www.st.com/resource/en/datasheet/stm32h743bi.pdf, Температурный диапазон="-40°C ~ 85°C (TA)", Тип элемента=Микросхема
DD2 DD6: "Микросхема драйвер двигателя", Артикул=TMC4671-LA, Вид монтажа=SMD, Корпус="76-VFQFN Exposed Pad", Описание="Multiphase Motor Driver Power MOSFET SPI, Step/Direction 76-QFN (10.5x6.5)", Производитель="Analog Devices Inc.", Строка для документации=https://www.analog.com/media/en/technical-documentation/data-sheets/TMC4671-LA_datasheet_Rev2.07.pdf, Температурный диапазон="-40°C ~ 125°C (TJ)", Тип элемента=Микросхема
DD3: "Кварцевый генератор", Артикул=ASE-25.000MHZ-L-C-T, Вид монтажа=SMD, Корпус="3.20mm x 2.50mm", Описание="25 MHz XO (Standard) CMOS Oscillator 3.3V Enable/Disable 4-SMD, No Lead", Производитель="Abracon LLC", Строка для документации=https://abracon.com/Oscillators/ASEseries.pdf, Температурный диапазон="-40°C ~ 85°C", Тип="XO (Standard)", Тип элемента="Кварцевый генератор", Точность=±50ppm, Частота=25MHz
DD4 DD5 DD7 DD8 DD9 DD10: "Микросхема сдвоенный триггер Шмитта", Артикул=74LVC2G17GW,125, Вид монтажа=SMD, Корпус=6-TSSOP, Описание="Buffer, Non-Inverting 2 Element 1 Bit per Element Push-Pull Output 6-TSSOP", Производитель="Nexperia USA Inc.", Строка для документации=https://assets.nexperia.com/documents/data-sheet/74LVC2G17.pdf, Температурный диапазон="-40°C ~ 125°C (TA)", Тип элемента=Микросхема
FU1 FU3 FU5 FU6 FU7 FU8 FU9 FU10 FU11 FU13 FU14 FU15 FU16 FU18 FU19 FU20 FU21 FU22 FU23 FU24: library part TBU-CA065-200-WH, "Полупроводниковый предохранитель", Артикул=TBU-CA065-200-WH, Вид монтажа=SMD, Корпус="6.50mm x 4.00mm", Напряжение=650V, Описание="SURGE SUPP TBU 200MA 650VIMP SMD", Производитель="Bourns Inc.", Строка для документации=https://www.bourns.com/docs/Product-Datasheets/TBU-CA.pdf, Температурный диапазон="-55°C ~ 125°C", Тип="Surge Suppression IС", Тип элемента=Предохранитель, Ток=200mA
FU2 FU4 FU12 FU17: library part MF-MSMF030-2, "Плавкий предохранитель", Артикул=MF-MSMF030-2, Вид монтажа=SMD, Корпус="1812 (4532 Metric), Concave", Напряжение=30V, Описание="Polymeric PTC Resettable Fuse 30V 300 mA Ih Surface Mount 1812 (4532 Metric), Concave", Производитель="Bourns Inc.", Строка для документации=https://www.bourns.com/docs/product-datasheets/mf-msmf.pdf, Температурный диапазон="-40°C ~ 85°C", Тип="PTC Resettable Fuse", Тип элемента=Предохранитель, Ток=300mA
FU25: library part MF-MSMF050/40X-2, "Плавкий предохранитель", Артикул=MF-MSMF050/40X-2, Вид монтажа=SMD, Корпус="1812 (4532 Metric), Concave", Напряжение=40V, Описание="Polymeric PTC Resettable Fuse 40V 500 mA Ih Surface Mount 1812 (4532 Metric), Concave", Производитель="Bourns Inc.", Строка для документации=https://www.bourns.com/docs/product-datasheets/mf-msmf.pdf, Температурный диапазон="-40°C ~ 85°C", Тип="PTC Resettable Fuse", Тип элемента=Предохранитель, Ток=500mA
FV1 FV2: "Газовый разрядник, трехвыводный", Артикул="F3R75-01J 75V", Вид монтажа="Through hole", Корпус="11.5mm x 7.5mm dia.", Напряжение пробоя=75V, Описание="Gas Discharge Tube 75 V 10000A (10kA) ±25% 3 Pole Through Hole Mount", Производитель=ZF, Строка для документации=http://nbruitian.com/show.asp?id=1412, Тип="Gas Discharge Tube Arresters (GDT)", Тип элемента="Газовый разрядник", Ток=10kA
HL1 HL2 HL3 HL4 HL5 HL6: "Светодиод", Вид монтажа=SMD, Корпус="0603 (1608 Metric)", Напряжение=2V, Описание="Green 567nm LED Indication - Discrete 2V 0603 (1608 Metric)", Производитель="G-nor Electronics", Прямой ток=20mA, Строка для документации=https://www.g-nor.com/Uploads/Ed/file/20210517/1621223120713818.doc, Температурный диапазон="-40°C ~ 80°C", Тип элемента="Диод светоизлучающий", Цвет=Зеленый
  HL1: Артикул=GNL-0603SRC, Длина волны=660nm, Яркость=15mcd
  HL2 HL3: Артикул=GNL-0603GC, Длина волны=567nm, Яркость=LED
  HL4 HL5 HL6: Артикул=GNL-0603GC, Длина волны=567nm, Яркость=12mcd
L1 L2 L3 L8: library part BLM18AG601SN1D, "Фильтр ЭМП индуктивный", Артикул=BLM18AG601SN1D, Вид монтажа=SMD, Корпус="0603 (1608 Metric)", Номинал="600 @ 100MHz", Описание="600 Ohms @ 100 MHz 1 Ferrite Bead 0603 (1608 Metric) 500mA 380mOhm", Производитель="Murata Electronics", Сопротивление=380m, Строка для документации=https://www.murata.com/en-us/products/productdata/8796738650142/ENFA0003.pdf, Температурный диапазон="-55°C ~ 125°C", Тип="Ferrite Bead", Тип элемента="Фильтр ЭМП", Ток=500mA
L4 L5: library part SRN8040-100M, "Дроссель с магнитопроводом", Артикул=SRN8040-100M, Вид монтажа=SMD, Корпус="8.00mm x 8.00mm", Номинал=10uH, Описание="15 µH Semi-Shielded Drum Core, Wirewound Inductor 2.4 A 70mOhm Max Nonstandard", Производитель="Bourns Inc.", Сопротивление=50m, Строка для документации=https://www.bourns.com/docs/Product-Datasheets/SRN8040.pdf, Температурный диапазон="-40°C ~ 125°C", Тип элемента=Дроссель, Ток насыщения=3.4A, Ток номинальный=3.1A, Точность=20%
L6 L7: library part VLS3012HBX-2R2M, "Дроссель с магнитопроводом", Артикул=VLS3012HBX-2R2M, Вид монтажа=SMD, Корпус="3.00mm x 3.00mm", Номинал=2.2uH, Описание="2.2 µH Shielded Drum Core, Wirewound Inductor 3.15 A 106mOhm Max Nonstandard", Производитель="TDK Corporation", Сопротивление=106m, Строка для документации=https://product.tdk.com/en/system/files?file=dam/doc/product/inductor/inductor/smd/catalog/inductor_commercial_power_vls3012hbx_en.pdf, Температурный диапазон="-40°C ~ 105°C", Тип элемента=Дроссель, Ток насыщения=3.35A, Ток номинальный=3.15A, Точность=20%